# Allegro board INTERPHONE_AD_VER3-1-26_150206.brd
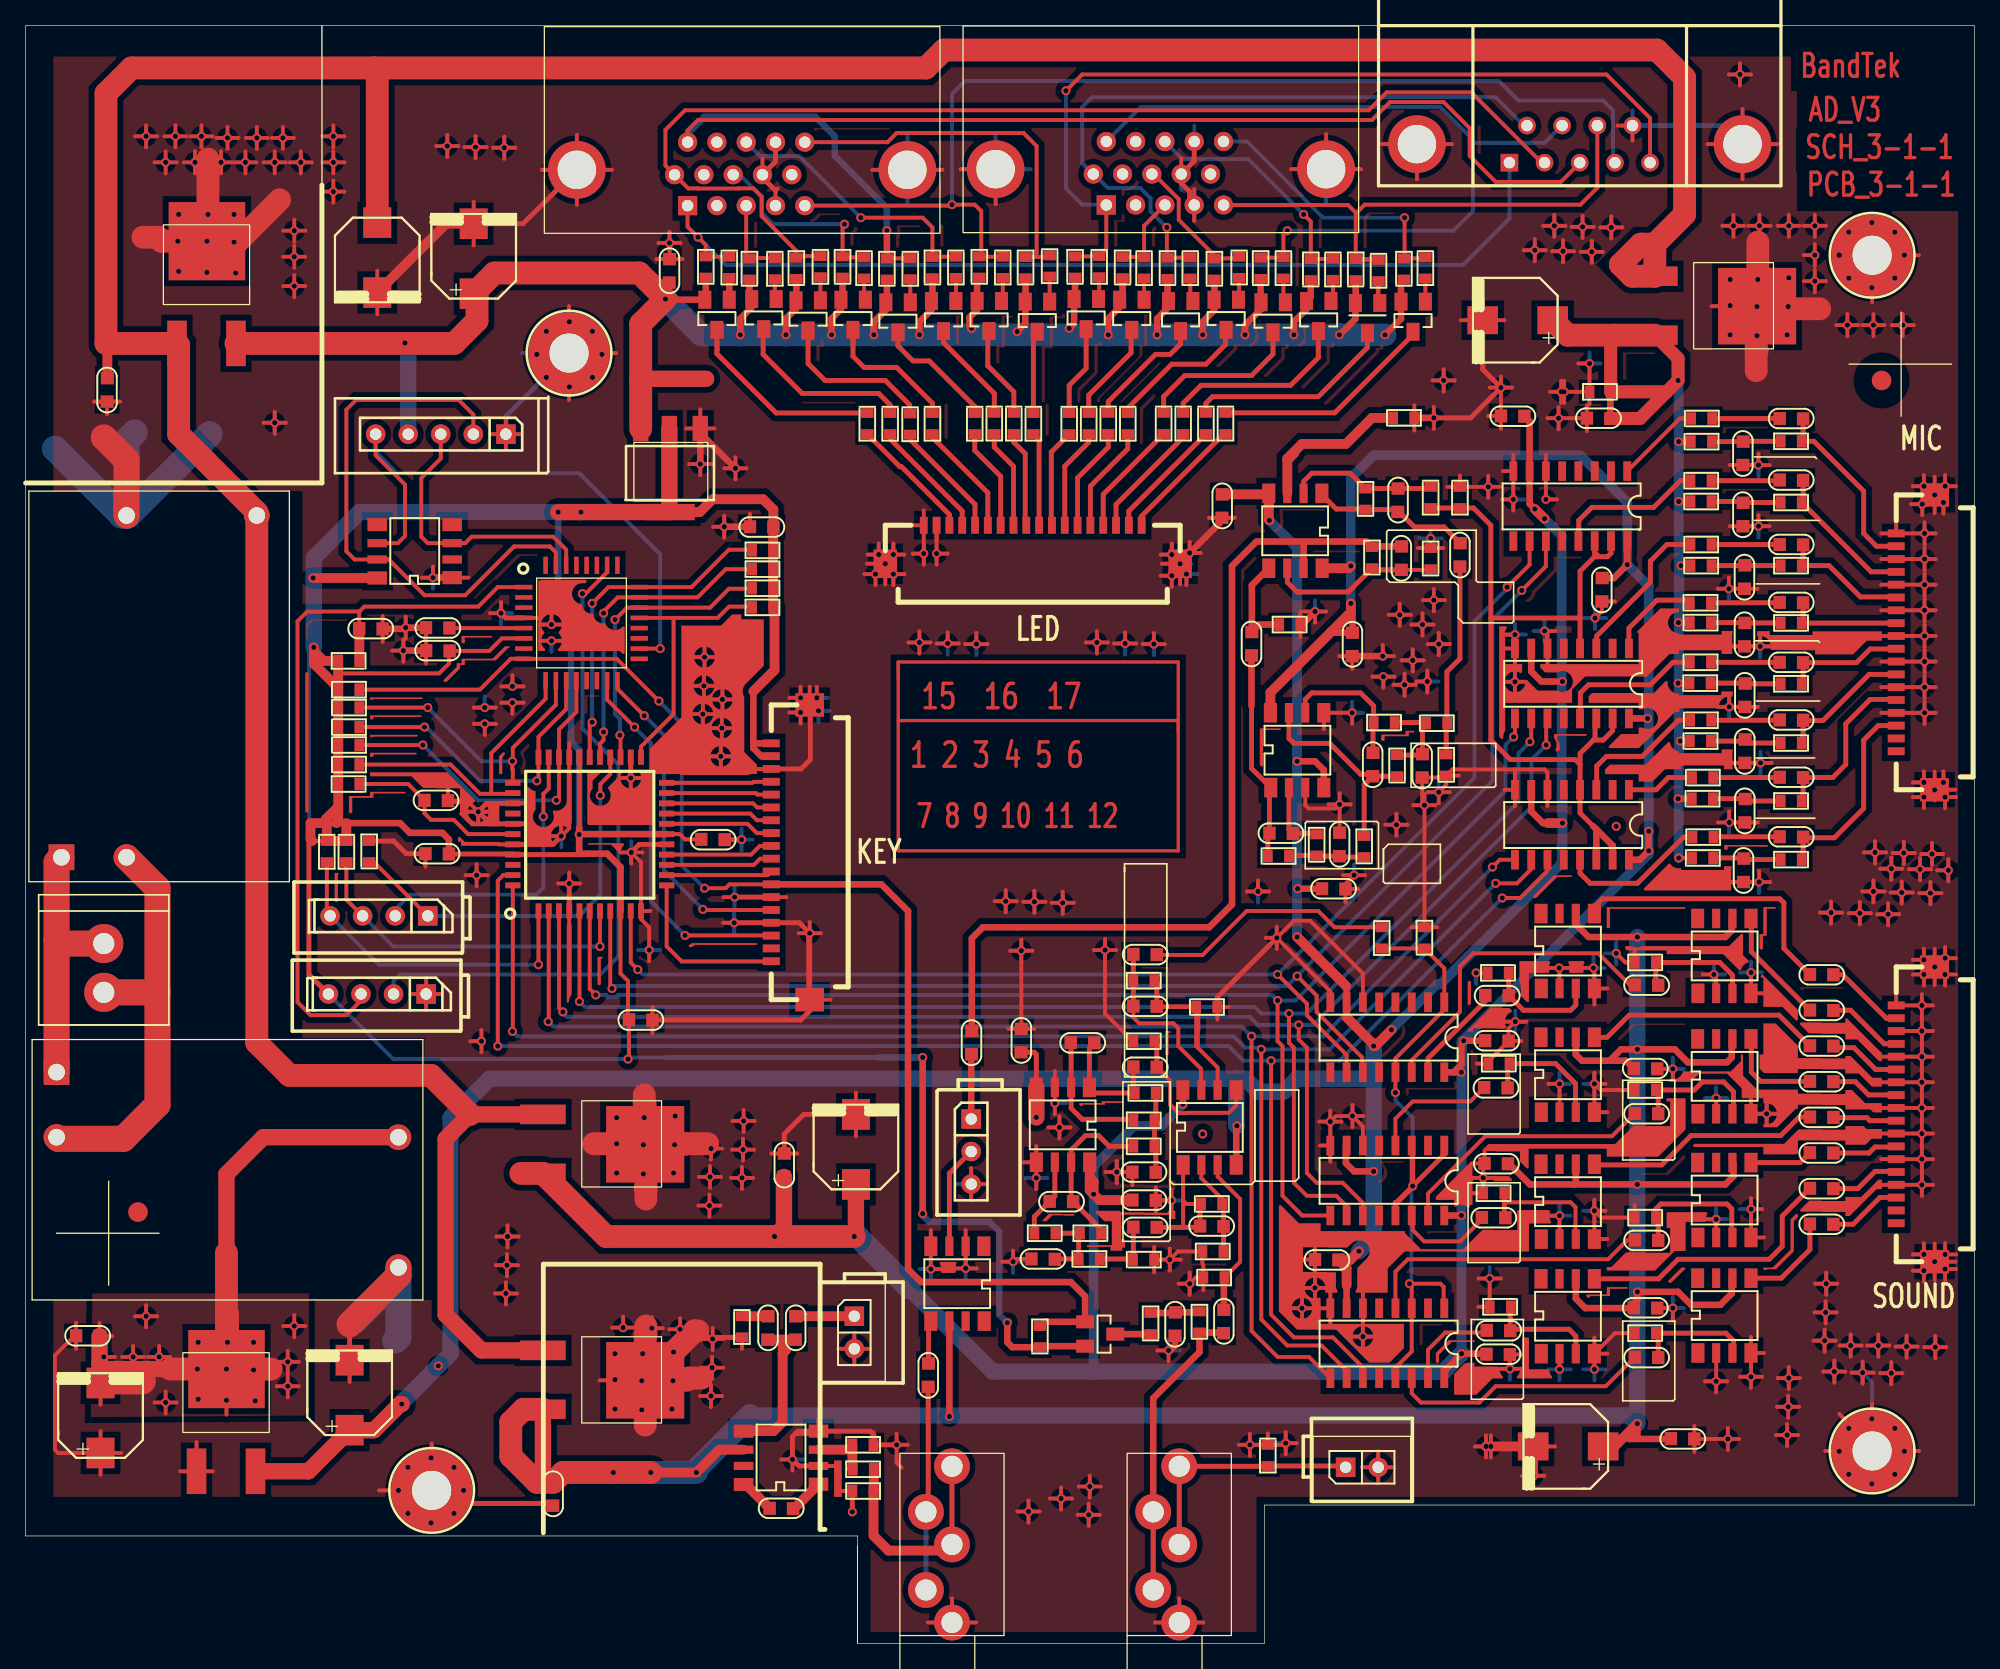
[diagram p0: board, top side]
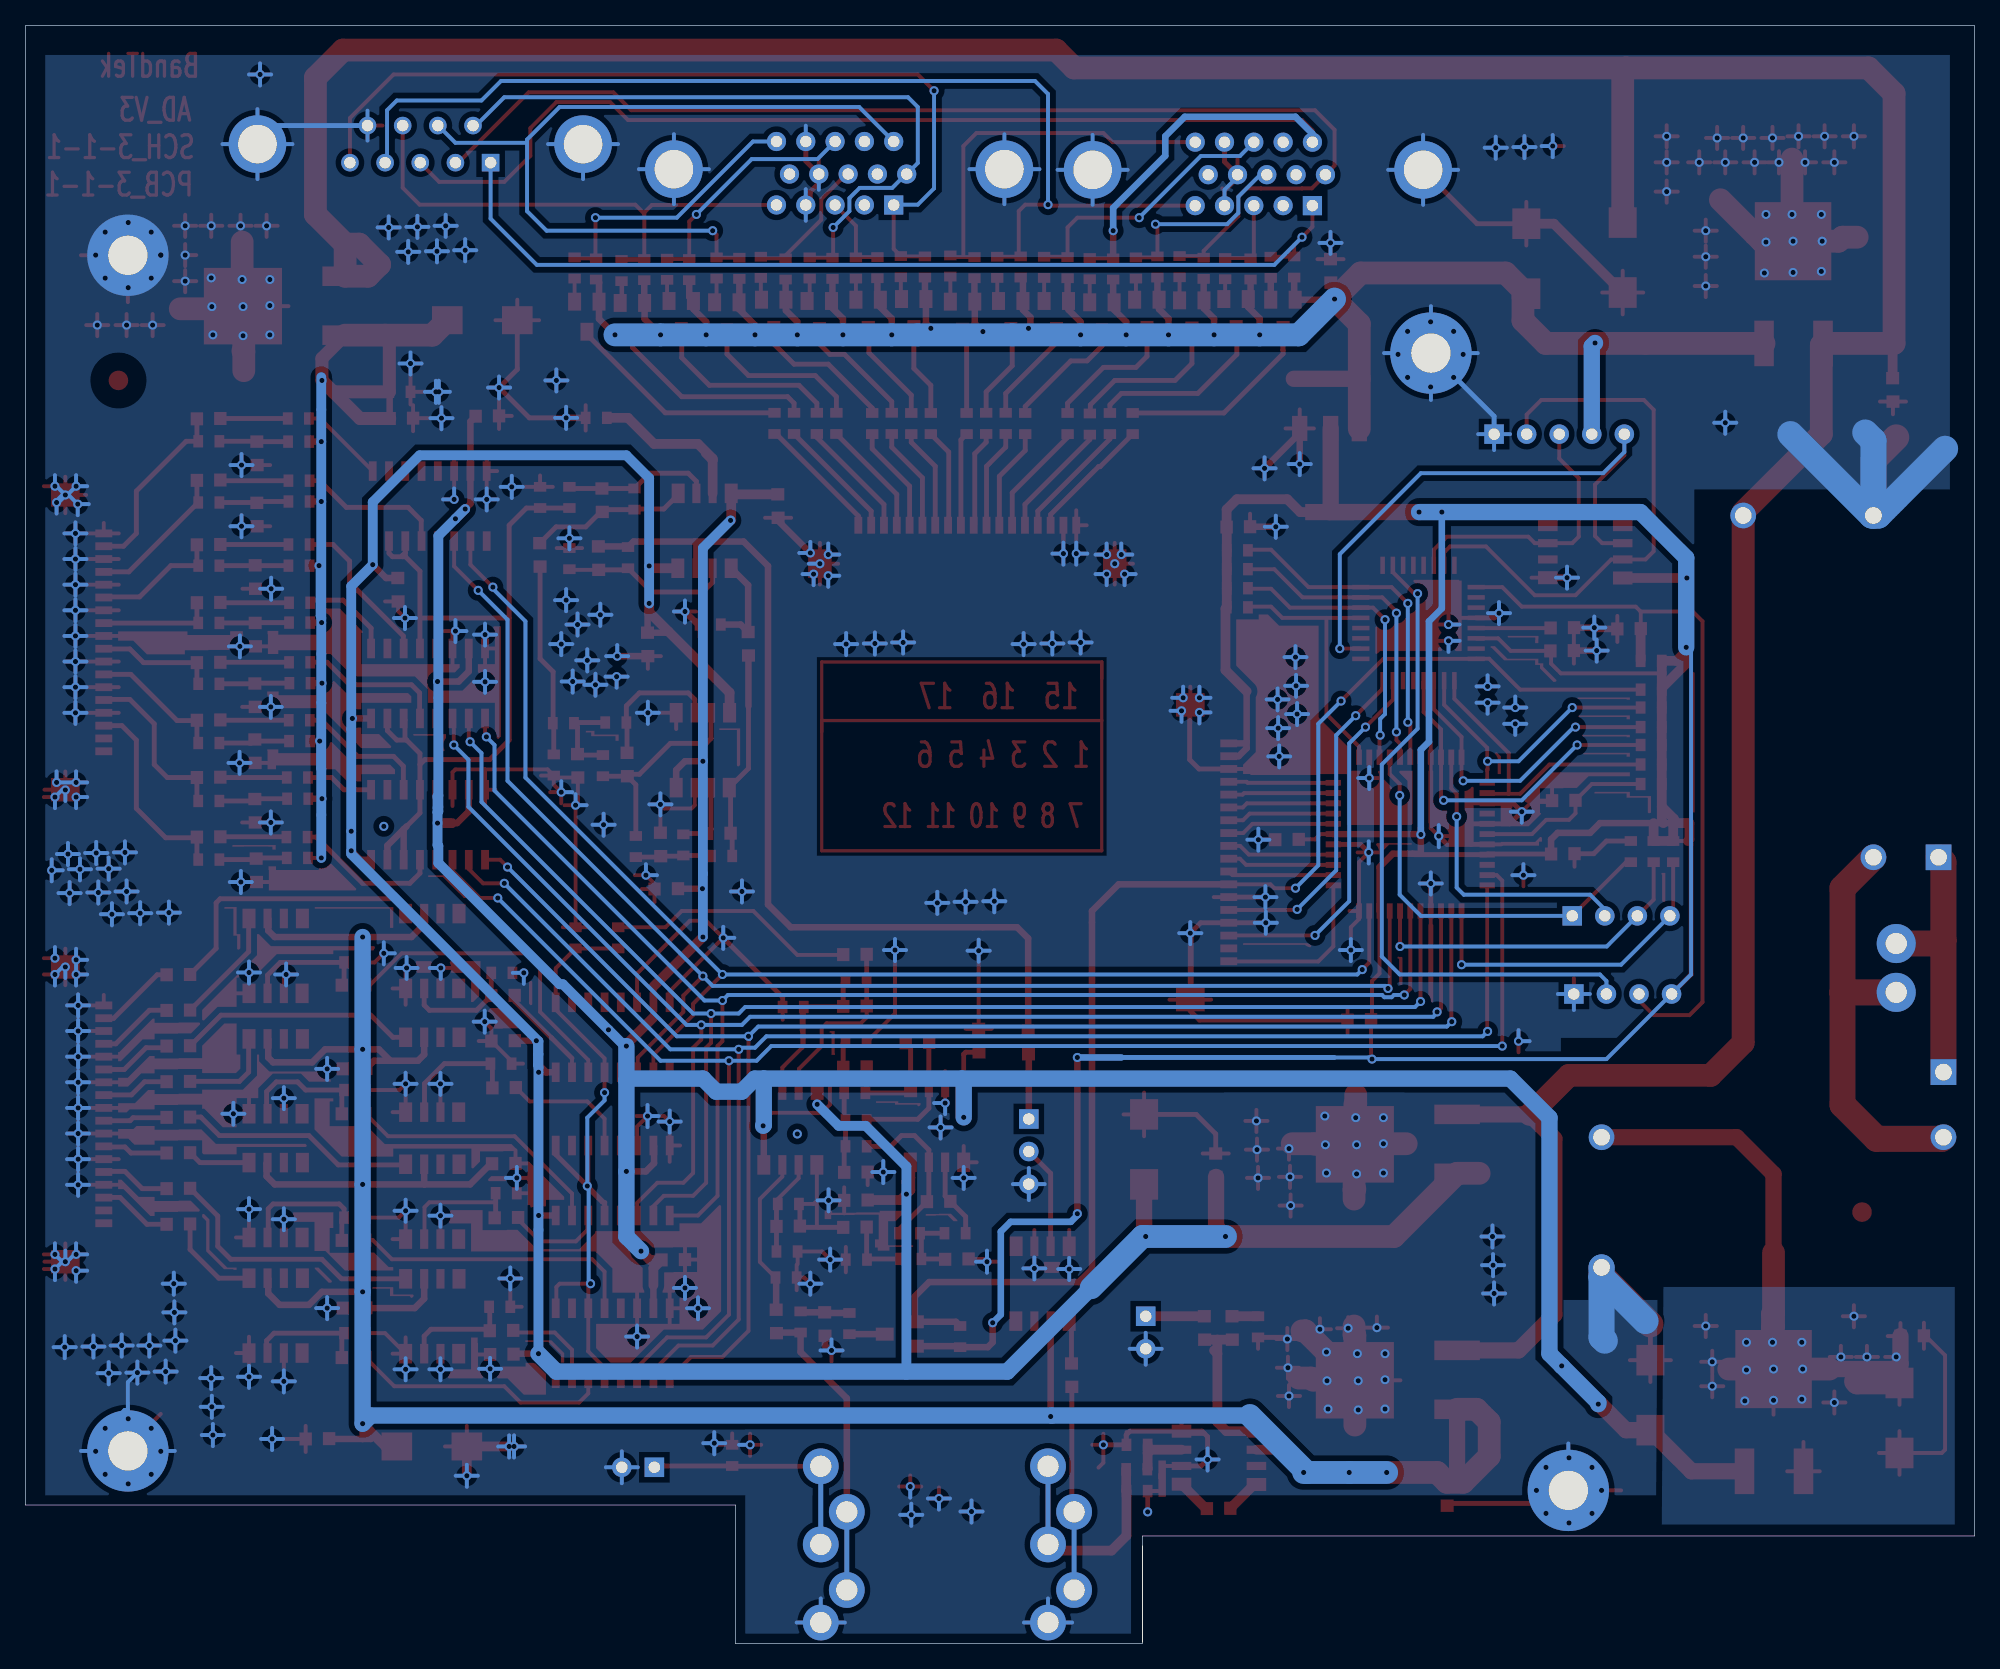
[diagram p1: board, bottom side, seen from below]

Outline 152.02 x 126.24 mm; copper layers: TOP, BOTTOM. Coordinates in mm from the lower left corner of the outline.
Outline path: 64.9,7.62 64.9,0.05 ; 0,126.24 152.02,126.24 152.02,10.79 96.65,10.79 96.65,0 64.9,0 64.9,8.38 0,8.38 0,126.24

## Design rules (mm)
nets with their own width: min track width 0.508; nets -12V

## Placement (name value [footprint] x y rotation side)
C6  100uf  [C0603]  140.13 52.17 0 top
C7  100uf  [C0603]  140.13 49.39 0 top
C8  100uf  [C0603]  140.13 46.61 0 top
C9  100uf  [C0603]  140.13 43.83 0 top
C10  100uf  [C0603]  140.13 41.05 0 top
C11  100uf  [C0603]  140.13 38.27 0 top
C12  100uf  [C0603]  140.13 35.48 0 top
C13  100uf  [C0603]  140.13 32.7 0 top
C19  0.1uF  [C0603]  32.08 61.62 180 top
C20  0.1uF  [C0603]  48.01 48.64 0 top
C21  0.1uF  [C0603]  32.13 77.47 180 top
C22  0.1uF  [C0603]  53.64 62.71 0 top
C68  100uf  [CAPAE660X570L]  27.43 110.36 270 top
C69  100uf  [CAPAE660X570L]  34.95 105.83 90 top
C70  0.1uF  [C0603]  50.23 107.12 90 top
C73  0.1uF  [C0603]  6.35 97.79 270 top
C75  0.1uF  [C0603]  122.96 82.19 270 top
C84  100uf  [CAPAE660X570L]  118.62 103.25 180 top
C86  0.1uF  [C0603]  122.68 95.61 180 top
C87  100p  [C0603]  107.06 89.23 90 top
C89  2.2nF  [C0603]  105.08 68.55 270 top
C90  0.1uF  [C0603]  116.03 95.76 0 top
C91  0.01uF  [C0603]  97.92 63.22 180 top
C95  0.1uF  [C0603]  111.89 84.91 270 top
C96  0.1uF  [C0603]  95.63 77.98 270 top
C97  10uF  [C0603]  73.79 46.86 270 top
C98  100uf  [C0603]  70.41 20.9 270 top
C101  0.01uF  [C0603]  108.94 68.45 270 top
C102  0.01uF  [C0603]  102.5 62.37 90 top
C103  0.1uF  [C0603]  103.5 77.98 90 top
C107  100pF  [C0603]  107.31 84.66 270 top
C110  0.1uF  [C0603]  114.74 37.43 0 top
C111  0.01uF  [C0603]  126.34 44.86 180 top
C115  0.1uF  [C0603]  137.72 72.06 180 top
C116  0.1uF  [C0603]  137.72 81.23 180 top
C117  0.1uF  [C0603]  137.72 90.78 180 top
C118  0.1uF  [C0603]  137.72 62.94 180 top
C119  10uF  [C0603]  134.11 69.6 270 top
C120  10uF  [C0603]  134.09 78.69 270 top
C121  10uF  [C0603]  133.96 88.06 270 top
C122  10uF  [C0603]  134.01 60.3 270 top
C123  0.1uF  [C0603]  137.72 67.59 180 top
C124  0.1uF  [C0603]  137.72 85.75 180 top
C125  0.1uF  [C0603]  137.72 76.56 180 top
C126  0.1uF  [C0603]  137.72 95.58 180 top
C127  10uF  [C0603]  134.11 64.95 270 top
C128  10uF  [C0603]  134.09 83.19 270 top
C129  10uF  [C0603]  134.11 73.96 270 top
C130  10uF  [C0603]  133.96 92.84 270 top
C131  100pF  [C0603]  92.51 32.56 180 top
C132  2.2nF  [C0603]  80.82 34.47 0 top
C134  0.1uF  [C0603]  93.34 88.77 90 top
C135  0.01uF  [C0603]  82.47 46.86 0 top
C136  0.1uF  [C0603]  114.85 22.57 180 top
C137  0.1uF  [C0603]  93.47 25.15 90 top
C138  0.1uF  [C0603]  87.35 32.46 0 top
C139  0.1uF  [C0603]  87.35 44.96 0 top
C140  1uF  [C0603]  87.35 53.75 0 top
C141  0.01uF  [C0603]  79.35 30 180 top
C142  0.01uF  [C0603]  87.22 36.78 180 top
C144  0.1uF  [C0603]  114.74 47.03 180 top
C145  0.1uF  [C0603]  101.52 29.92 0 top
C146  10uF  [C0603]  89.66 24.89 270 top
C148  100pF  [C0603]  87.35 49.71 0 top
C154  1uF  [C0603]  126.47 22.3 0 top
C155  1uF  [C0603]  114.92 24.4 0 top
C156  1uF  [C0603]  126.47 31.45 0 top
C157  1uF  [C0603]  114.54 33.21 0 top
C166  1uF  [C0603]  126.47 41.33 0 top
C167  1uF  [C0603]  114.72 43.35 0 top
C168  1uF  [C0603]  126.47 51.36 0 top
C169  1uF  [C0603]  114.81 50.55 0 top
C181  100uf  [CAPAE660X570L]  122.56 15.37 180 top
C182  100uf  [CAPAE660X570L]  5.84 15.37 90 top
C183  0.1uF  [C0603]  4.83 24 180 top
C185  0.1uF  [C0603]  77.67 47.07 90 top
C403  100uf  [CAPAE660X570L]  64.77 36.32 90 top
C405  0.1uF  [C0603]  59.18 37.34 90 top
C406  NC\10uF  [C0603]  60.07 24.64 90 top
C407  NC  [C0603]  57.91 24.64 90 top
C409  NC\10uF  [C0603]  58.93 10.54 180 top
C411  100uf  [CAPAE660X570L]  25.27 17.14 90 top
C412  0.1uF  [C0603]  129.29 15.95 0 top
C413  0.1uF  [C0603]  87.22 34.59 180 top
C414  0.1uF  [C0603]  102.02 58.89 180 top
C415  0.01uF  [C0603]  41.15 11.68 90 top
C416  0.1uF  [C0603]  126.34 26.19 180 top
C417  0.1uF  [C0603]  57.44 87.11 0 top
C418  1uF  [C0603]  32.17 79.24 0 top
C421  0.1uF  [C0603]  26.91 79.18 180 top
C422  0.1uF  [C0603]  32 65.79 180 top
DB1  DB9  [DB9-H]  121.23 128.78 180 top
DB15-1  DB15-1  [DB15-VGA]  40.46 110.03 0 top
DB15-2  DB15-2  [DB15-VGA]  73.13 110.08 0 top
H1  h1  [MH250C120D]  144.04 108.32 0 top
H2  h1  [MH250C120D]  144.04 15.02 0 top
H3  h1  [MH250C120D]  42.39 100.69 0 top
H4  h1  [MH250C120D]  31.67 11.94 0 top
H5  NC\HEADER2  [HEADER2]  64.64 25.53 270 top
H6  E_MIC  [HEADER2]  102.97 13.74 0 top
H7  HEADER2  [HEADER2-150MIL]  6.1 50.8 0 top
J2  CPLD  [HEADER4]  31.37 56.77 180 top
J19  MASTER_sound_out  [3M5-MUSIC-COLOR]  72.26 13.82 180 top
J20  MASTER_mic_in  [3M5-MUSIC-COLOR]  89.99 13.82 180 top
J21  HEADER  [HEADER5]  37.47 94.36 180 top
MIC_IN1  MIC_IN  [FH12-18-1SH]  145.92 86.61 270 top
NOREF  -  []  45.8 9.6 0 top
NOREF#2  -  [unnamed#2]  144.78 98.55 0 top
NOREF#3  -  [unnamed#2]  8.76 33.66 0 top
PORT2  PORT2  [FH12-18-1SH]  87.06 87.25 180 top
PORT4  PORT  [FH12-18-1SH]  58.17 70.23 270 top
POT1  10k/DIP  [HEADER3]  73.76 37.11 270 top
Q1  3906  [SOT23]  61.04 103.63 0 top
Q2  3906  [SOT23]  53.92 103.68 0 top
Q3  3906  [SOT23]  64.54 103.68 0 top
Q4  3906  [SOT23]  57.58 103.73 0 top
Q5  3906  [SOT23]  68.05 103.48 0 top
Q6  3906  [SOT23]  75.16 103.58 0 top
Q7  3906  [SOT23]  71.6 103.58 0 top
Q8  3906  [SOT23]  78.92 103.53 0 top
Q9  3906  [SOT23]  82.73 103.73 0 top
Q10  3906  [SOT23]  90.09 103.58 0 top
Q11  3906  [SOT23]  86.28 103.68 0 top
Q12  3906  [SOT23]  93.65 103.68 0 top
Q13  3906  [SOT23]  104.67 103.43 0 top
Q14  3906  [SOT23]  97.31 103.48 0 top
Q15  3906  [SOT23]  108.23 103.53 0 top
Q16  3906  [SOT23]  100.86 103.58 0 top
Q33  TCS1307  [SOT23]  83.82 24.13 90 top
R10  1K  [R0603]  69 95.21 270 top
R11  1K  [R0603]  65.66 95.25 270 top
R12  10K  [R0603]  60.12 107.24 90 top
R13  10K  [R0603]  53.06 107.34 90 top
R14  1K  [R0603]  62 107.49 270 top
R15  1K  [R0603]  54.89 107.44 270 top
R16  1K  [R0603]  70.74 95.25 270 top
R17  1K  [R0603]  67.44 95.25 270 top
R18  10K  [R0603]  63.73 107.34 90 top
R19  10K  [R0603]  56.46 107.19 90 top
R20  1K  [R0603]  65.41 107.39 270 top
R21  1K  [R0603]  58.45 107.34 270 top
R22  1K  [R0603]  74.04 95.25 270 top
R23  1K  [R0603]  77.09 95.26 270 top
R24  10K  [R0603]  67.18 107.19 90 top
R25  10K  [R0603]  74.4 107.34 90 top
R26  1K  [R0603]  69.01 107.34 270 top
R27  1K  [R0603]  76.23 107.44 270 top
R28  1K  [R0603]  75.56 95.26 270 top
R29  1K  [R0603]  78.61 95.25 270 top
R30  10K  [R0603]  70.74 107.29 90 top
R31  10K  [R0603]  78 107.29 90 top
R32  1K  [R0603]  72.57 107.44 270 top
R33  1K  [R0603]  79.88 107.54 270 top
R34  1K  [R0603]  81.41 95.25 270 top
R35  1K  [R0603]  84.45 95.26 270 top
R36  10K  [R0603]  81.86 107.34 90 top
R37  10K  [R0603]  89.08 107.24 90 top
R38  1K  [R0603]  83.74 107.49 270 top
R39  1K  [R0603]  90.86 107.39 270 top
R40  1K  [R0603]  82.93 95.25 270 top
R41  1K  [R0603]  85.98 95.25 270 top
R42  10K  [R0603]  85.57 107.29 90 top
R43  10K  [R0603]  92.74 107.19 90 top
R44  1K  [R0603]  87.25 107.39 270 top
R45  1K  [R0603]  94.67 107.44 270 top
R46  1K  [R0603]  92.08 95.26 270 top
R47  1K  [R0603]  88.77 95.26 270 top
R48  10K  [R0603]  103.76 107.14 90 top
R49  10K  [R0603]  96.34 107.24 90 top
R50  1K  [R0603]  105.54 107.19 270 top
R51  1K  [R0603]  98.12 107.39 270 top
R52  1K  [R0603]  93.6 95.26 270 top
R53  1K  [R0603]  90.3 95.26 270 top
R54  10K  [R0603]  107.52 107.19 90 top
R55  10K  [R0603]  100.25 107.14 90 top
R56  1K  [R0603]  109.19 107.39 270 top
R57  1K  [R0603]  101.98 107.29 270 top
R80  5.1k  [R0603]  104.52 89.23 90 top
R81  6.8k  [R0603]  106.98 68.43 90 top
R82  3.3k  [R0603]  97.66 61.44 0 top
R83  100  [R0603]  109.6 89.48 270 top
R84  6.8k  [R0603]  110.01 71.81 0 top
R85  5.1k  [R0603]  106.05 71.86 180 top
R86  3.3k  [R0603]  104.42 62.12 90 top
R87  3.3k  [R0603]  100.71 62.24 90 top
R88  3.3k  [R0603]  111.89 89.48 270 top
R89  5.1k  [R0603]  110.82 68.48 90 top
R91  5.1k  [R0603]  98.68 79.5 180 top
R92  10k  [R0603]  107.44 95.63 0 top
R93  10k  [R0603]  105.03 84.66 90 top
R94  3.3k  [R0603]  109.6 84.58 90 top
R95  12k  [R0603]  130.61 72.03 0 top
R96  12k  [R0603]  130.58 81.2 0 top
R97  12k  [R0603]  130.63 90.73 0 top
R98  12k  [R0603]  130.78 62.92 0 top
R99  100  [R0603]  137.79 70.26 180 top
R100  100  [R0603]  137.79 79.63 180 top
R101  100  [R0603]  137.79 89.03 180 top
R102  100  [R0603]  137.79 61.16 180 top
R103  100  [R0603]  130.58 70.41 0 top
R104  100  [R0603]  130.58 79.65 0 top
R105  100  [R0603]  130.63 89.1 0 top
R106  100  [R0603]  130.76 61.29 0 top
R107  12k  [R0603]  130.76 67.56 0 top
R108  12k  [R0603]  130.63 85.75 0 top
R109  12k  [R0603]  130.58 76.56 0 top
R110  12k  [R0603]  130.68 95.58 0 top
R111  100  [R0603]  137.79 74.88 180 top
R112  100  [R0603]  137.79 65.74 180 top
R113  100  [R0603]  137.79 84.1 180 top
R114  100  [R0603]  130.73 65.91 0 top
R115  100  [R0603]  130.63 84.1 0 top
R116  100  [R0603]  137.79 93.8 180 top
R117  100  [R0603]  130.56 74.93 0 top
R118  100  [R0603]  130.66 93.78 0 top
R119  10k  [R0603]  92.46 34.29 0 top
R120  6.8k  [R0603]  83.13 32 180 top
R121  3.3k  [R0603]  87.27 42.95 0 top
R122  6.8k  [R0603]  82.91 30 0 top
R123  5.1k  [R0603]  79.58 32 180 top
R124  100k  [R0603]  96.9 14.73 270 top
R125  5.1k  [R0603]  92.63 28.55 0 top
R126  3.3k  [R0603]  87.3 38.79 180 top
R127  3.3k  [R0603]  87.3 40.82 180 top
R128  5.1k  [R0603]  87.15 29.95 0 top
R129  5.1k  [R0603]  87.3 46.99 180 top
R130  5.1k  [R0603]  109.12 54.99 90 top
R131  3.3k  [R0603]  91.57 25.02 90 top
R132  3.3k  [R0603]  92.68 30.58 180 top
R133  20k  [R0603]  87.76 24.89 90 top
R134  1K  [R0603]  79.12 23.88 90 top
R135  10k  [R0603]  87.3 51.71 180 top
R136  3.3k  [R0603]  92.08 49.66 0 top
R137  100k  [R0603]  126.42 24.21 180 top
R138  100k  [R0603]  115.1 26.26 180 top
R139  100k  [R0603]  126.42 33.22 180 top
R140  100k  [R0603]  114.59 35.13 180 top
R141  100k  [R0603]  126.42 43.18 180 top
R142  100k  [R0603]  115 45.24 180 top
R143  100k  [R0603]  126.42 53.14 180 top
R144  100k  [R0603]  114.94 52.32 180 top
R145  0R  [R0603]  105.79 55.12 270 top
R164  NC  [R0603]  55.88 24.77 270 top
R165  100k  [R0603]  65.25 11.89 0 top
R166  NC\10k  [R0603]  65.41 13.59 180 top
R167  NC\3.3k  [R0603]  65.25 15.49 0 top
R168  5.1k  [R0603]  122.89 97.66 180 top
R187  10K  [R0603]  25.15 68.58 0 top
R188  10K  [R0603]  25.15 73.03 0 top
R189  10K  [R0603]  25.15 71.5 0 top
R190  10K  [R0603]  25.15 70.1 0 top
R191  10K  [R0603]  57.56 85.29 180 top
R192  10K  [R0603]  57.56 82.34 180 top
R193  10K  [R0603]  57.56 83.83 180 top
R194  10K  [R0603]  57.56 80.84 180 top
R195  10k  [R0603]  25.27 76.67 180 top
R196  10K  [R0603]  25.15 74.42 0 top
R208  10k  [R0603]  25.02 61.85 270 top
R209  10k  [R0603]  23.5 61.85 270 top
R210  10k  [R0603]  26.8 61.72 90 top
R213  10k  [R0603]  25.27 67.06 180 top
SOUND_OUT1  SOUND_OUT  [FH12-18-1SH]  145.92 49.78 270 top
U7  EPM7032  [TQFP44]  44.09 63.15 90 top
U15  79M05  [TO252AA]  13.34 14.73 0 top
U18  78M05  [TO252AA]  11.81 102.74 0 top
U21  5532  [SOP8]  100.97 89.48 180 top
U22  5532  [SOP8]  97.28 67.03 0 top
U24  386  [SOP8]  74.6 30.73 180 top
U25  5532  [SOP8]  82.83 43.13 180 top
U26  5532  [SOP8]  90.45 37.59 0 top
U27  386  [SOP8]  130.61 22.91 0 top
U28  386  [SOP8]  118.39 22.86 0 top
U29  386  [SOP8]  130.61 31.93 0 top
U30  386  [SOP8]  118.39 31.8 0 top
U31  386  [SOP8]  130.61 41.58 0 top
U32  386  [SOP8]  118.39 41.71 0 top
U33  386  [SOP8]  130.61 50.98 0 top
U34  386  [SOP8]  118.39 51.36 0 top
U35  4053  [SOIC16]  106.22 23.67 270 top
U36  4053  [SOIC16]  120.62 64.14 270 top
U37  4053  [SOIC16]  106.22 36.37 270 top
U38  4053  [SOIC16]  120.62 75.16 270 top
U41  4053  [SOIC16]  106.22 47.55 270 top
U42  4053  [SOIC16]  120.5 89 270 top
U45  78M05  [TO252AA]  128.4 106.68 270 top
U47  NC\386  [SOP8]  61.59 12.57 90 top
U48  78M05  [TO252AA]  41.66 41.27 270 top
U51  78M05  [TO252AA]  41.66 22.86 270 top
U52  STM8S103K3T6C  [LQFP32]  43.36 79.62 0 top
U400  TPM  [SOP8]  33.02 83.31 90 top
U401  1117  [SOT-223]  50.29 94.75 180 top
U402  POWER_AC_TO_DC1  [ACDC_MODEL1]  15.75 36.96 0 top
U403  POWER_AC_TO_DC1  [ACDC_MODEL1]  10.41 74.68 90 top
UART_2  UART_51  [HEADER4]  31.24 50.67 180 top

## Library data of the parts
C6-C13 C68 C69 C84 C97 C98 C119-C122 C127-C130 C146 C181 C182 C403 C409 C411 = CAPACITOR POL_0
C19-C22 = CAPACITOR NON-POL
C70 C73 C75 C86 C87 C89-C91 C95 C96 C101-C103 C107 C110 C111 C115-C118 C123-C126 C131 C132 C134-C142 C144 C145 C148 C154-C157 C166-C169 C183 C185 C405-C407 C412-C418 C421 C422 = CAP_0
DB1 = CON2_13
DB15-1 DB15-2 = CON2_8: User Part Number: ***
H1-H4 = HEADER 5_0
H5 H6 = CY7C68013A-100_0
H7 = HEADER2
J2 UART_2 = HEADER 5_6
J19 J20 = CON2_12
J21 = HEADER5
MIC_IN1 = CON2_2
PORT2 = CON2_0
PORT4 = CON2_7
POT1 = RESISTOR VAR_0
Q1-Q16 = NPN_3
Q33 = FDC634P_4
R10-R57 = R_1
R80-R89 R91-R145 R164-R167 = RESISTOR_2
R168 R187-R194 R196 = RES
R195 R208-R210 R213 = R
SOUND_OUT1 = CON2_1
U7 = EPM7032_1
U15 = CY7C68013A-100_4
U18 U45 U48 U51 = CY7C68013A-100_3
U21 U22 U25 U26 = 1211_23
U24 U27-U34 U47 = 1211_14
U35-U38 U41 U42 = 4051_6
U52 = STM8
U400 = TPM
U401 = 1117
U402 U403 = POWER_AC_TO_DC1

## Footprints (pads in the part's own frame, mm; a bottom-side part is the same pattern mirrored in y, then rotated)
3M5-MUSIC-COLOR
  round 2.794 hole 1.651: 1(0,12.192) 2(2.032,9.652) 3(0,6.096) 4(2.032,3.556) 5(0,0)
ACDC_MODEL1
  rect 2.007x2.007 hole 1.295: 1(-13.335,7.62)
  round 2.007 hole 1.295: 2(-13.335,2.54) 3(13.335,-7.62) 5(13.335,2.54)
C0603
  rect 0.965x1.016 smd: 1(-0.94,0.025) 2(0.889,0)
CAPAE660X570L
  rect 2.388x2.184 smd: 1(-0.508,0) 2(4.953,0)
DB9-H
  rect 1.372x1.372 hole 0.889: 1(5.486,13.233)
  round 1.372 hole 0.889: 2(2.743,13.233) 3(0,13.233) 4(-2.743,13.233) 5(-5.486,13.233) 6(4.115,10.338) 7(1.372,10.338) 8(-1.372,10.338) 9(-4.115,10.338)
  round 4.496 hole 2.997: 10(-12.7,11.786) 11(12.7,11.786)
DB15-VGA
  rect 1.499x1.499 hole 0.889: 1(11.176,2.159)
  round 1.499 hole 0.889: 2(13.462,2.159) 3(15.748,2.159) 4(18.034,2.159) 5(20.32,2.159) 6(10.16,4.572) 7(12.446,4.572) 8(14.732,4.572) 9(17.018,4.572) 10(19.304,4.572) 11(11.176,7.112) 12(13.462,7.112) 13(15.748,7.112) 14(18.034,7.112) 15(20.32,7.112)
  round 4.496 hole 2.997: 16(2.54,4.953) 17(28.321,4.953)
FH12-18-1SH
  rect 0.61x1.321 smd: 1(0,0) 2(1.001,0) 3(1.999,0) 4(3,0) 5(4,0) 6(5.001,0) 7(6,0) 8(7,0) 9(8.001,0) 10(8.999,0) 11(10,0) 12(11.001,0) 13(11.999,0) 14(13,0) 15(14.001,0) 16(15.001,0) 17(16,0) 18(17,0)
  rect 1.829x2.235 smd: 19(20,3) 20(-3,3)
HEADER2
  rect 1.524x1.524 hole 0.889: 1(0,0)
  round 1.524 hole 0.889: 2(2.54,0)
HEADER2-150MIL
  round 3.048 hole 1.651: 1(0,3.81) 2(0,0)
HEADER3
  rect 1.524x1.524 hole 0.889: 1(-3.81,0)
  round 1.524 hole 0.889: 2(-1.27,0) 3(1.27,0)
HEADER4
  rect 1.524x1.524 hole 0.889: 1(0,0)
  round 1.524 hole 0.889: 2(2.54,0) 3(5.08,0) 4(7.62,0)
HEADER5
  rect 1.524x1.524 hole 0.889: 1(0,0)
  round 1.524 hole 0.889: 2(2.54,0) 3(5.08,0) 4(7.62,0) 5(10.16,0)
LQFP32
  rect 1.346x0.356 smd: 1(-4.501,2.799) 2(-4.501,1.999) 3(-4.501,1.199) 4(-4.501,0.399) 5(-4.501,-0.399) 6(-4.501,-1.199) 7(-4.501,-1.999) 8(-4.501,-2.799) 17(4.501,-2.799) 18(4.501,-1.999) 19(4.501,-1.199) 20(4.501,-0.399) 21(4.501,0.399) 22(4.501,1.199) 23(4.501,1.999) 24(4.501,2.799)
  rect 0.356x1.346 smd: 9(-2.799,-4.501) 10(-1.999,-4.501) 11(-1.199,-4.501) 12(-0.399,-4.501) 13(0.399,-4.501) 14(1.199,-4.501) 15(1.999,-4.501) 16(2.799,-4.501) 25(2.799,4.501) 26(1.999,4.501) 27(1.199,4.501) 28(0.399,4.501) 29(-0.399,4.501) 30(-1.199,4.501) 31(-1.999,4.501) 32(-2.799,4.501)
MH250C120D
  round 6.35 hole 3.048: 1(0,0)
R0603
  rect 0.762x0.965 smd: 1(-0.762,0) 2(0.889,0)
SOIC16
  rect 1.524x0.61 smd: 1(-2.477,4.445) 2(-2.477,3.175) 3(-2.477,1.905) 4(-2.477,0.635) 5(-2.477,-0.635) 6(-2.477,-1.905) 7(-2.477,-3.175) 8(-2.477,-4.445) 9(2.985,-4.445) 10(2.985,-3.175) 11(2.985,-1.905) 12(2.985,-0.635) 13(2.985,0.635) 14(2.985,1.905) 15(2.985,3.175) 16(2.985,4.445)
SOP8
  rect 1.016x1.524 smd: 1(-0.152,-0.254) 4(3.988,-0.254) 5(3.988,5.588) 8(-0.178,5.588)
  rect 0.635x1.524 smd: 2(1.27,-0.254) 3(2.54,-0.254) 6(2.54,5.588) 7(1.27,5.588)
SOT23
  rect 1.016x1.397 smd: 1(0.965,1.168) 2(-0.94,1.168) 3(0,-1.181)
SOT-223
  rect 1.194x1.956 smd: 1(-2.337,-0.051) 2(0.076,-0.051) 3(2.311,-0.025)
  rect 3.81x1.27 smd: 4(0,6.477)
TO252AA
  rect 1.524x3.556 smd: 1(-0.004,-1.304) 3(4.596,-1.304)
  rect 5.969x6.096 smd: 2(2.332,6.673)
TQFP44
  rect 1.194x0.457 smd: 1(-6,4.08) 2(-6,3.28) 3(-6,2.48) 4(-6,1.68) 5(-6,0.88) 6(-6,0.08) 7(-6,-0.72) 8(-6,-1.52) 9(-6,-2.32) 10(-6,-3.12) 11(-6,-3.92) 23(6,-3.92) 24(6,-3.12) 25(6,-2.32) 26(6,-1.52) 27(6,-0.72) 28(6,0.08) 29(6,0.88) 30(6,1.68) 31(6,2.48) 32(6,3.28) 33(6,4.08)
  rect 0.457x1.194 smd: 12(-4,-5.92) 13(-3.2,-5.92) 14(-2.4,-5.92) 15(-1.6,-5.92) 16(-0.8,-5.92) 17(0,-5.92) 18(0.8,-5.92) 19(1.6,-5.92) 20(2.4,-5.92) 21(3.2,-5.92) 22(4,-5.92) 34(4,6.08) 35(3.2,6.08) 36(2.4,6.08) 37(1.6,6.08) 38(0.8,6.08) 39(0,6.08) 40(-0.8,6.08) 41(-1.6,6.08) 42(-2.4,6.08) 43(-3.2,6.08) 44(-4,6.08)
unnamed#2
  round 1.524 smd: 1(0,0)

## Nets
5V-1: C75.1 C103.2 C136.2 C144.2 C403.1 C405.1 C413.2 U21.8(+VCC) U22.8(+VCC) U25.8(+VCC) U26.8(+VCC) U35.16(VDD) U36.16(VDD) U37.16(VDD) U38.16(VDD) U41.16(VDD) U42.16(VDD) U48.3(OUT)
5V-2: C69.1 C70.1 J21.4 Q1.2 Q2.2 Q3.2 Q4.2 Q5.2 Q6.2 Q7.2 Q8.2 Q9.2 Q10.2 Q11.2 Q12.2 Q13.2 Q14.2 Q15.2 Q16.2 R12.1 R13.1 R18.1 R19.1 R24.1 R25.1 R30.1 R31.1 R36.1 R37.1 R42.1 R43.1 R48.1 R49.1 R54.1 R55.1 U18.3(OUT) U401.3(IN)
5V-3: C84.1 C86.1 R103.1 R104.1 R105.1 R106.1 R114.1 R115.1 R117.1 R118.1 R168.1 U45.3(OUT)
5V-4: C110.2 C111.2 C181.1 C412.1 C415.2 C416.2 U24.6(VCC) U27.6(VCC) U28.6(VCC) U29.6(VCC) U30.6(VCC) U31.6(VCC) U32.6(VCC) U33.6(VCC) U34.6(VCC) U47.6(VCC) U51.3(OUT)
+12V: C68.1 C73.1 U18.1(IN) U45.1(IN) U48.1(IN) U51.1(IN) U403.3(DC_OUT)
-5V: C90.2 C134.2 C145.2 C185.1 C411.1 C414.2 U15.3(OUT) U21.4(-VDD) U22.4(-VDD) U25.4(-VDD) U26.4(-VDD) U35.7(VEE) U36.7(VEE) U37.7(VEE) U38.7(VEE) U41.7(VEE) U42.7(VEE)
-12V: C182.2 C183.1 U15.2(IN) U402.5(GND)
GND: C19.2 C20.2 C21.2 C22.2 C68.2 C69.2 C70.2 C73.2 C75.2 C84.2 C86.2 C90.1 C101.2 C102.2 C103.1 C110.1 C111.1 C119.2 C120.2 C121.2 C122.2 C127.2 C128.2 C129.2 C130.2 C134.1 C136.1 C141.2 C142.2 C144.1 C145.1 C146.2 C181.2 C182.1 C183.2 C185.2 C403.2 C405.2 C411.2 C412.2 C413.1 C414.1 C415.1 C416.1 C417.1 C418.1 C421.1 C422.1 DB1.9 DB1.10 DB1.11 DB15-1.4 DB15-1.9 DB15-1.14 DB15-1.16 DB15-1.17 DB15-2.4 DB15-2.9 DB15-2.14 DB15-2.16 DB15-2.17 H1.1 H2.1 H3.1 H4.1 H5.2 H6.2 J19.1 J20.1 J21.1 MIC_IN1.1 MIC_IN1.3 MIC_IN1.5 MIC_IN1.7 MIC_IN1.9 MIC_IN1.11 MIC_IN1.13 MIC_IN1.15 MIC_IN1.19 MIC_IN1.20 PORT2.17 PORT2.18 PORT2.19 PORT2.20 PORT4.3 PORT4.13 PORT4.15 PORT4.19 PORT4.20 POT1.3(B) R88.1 R89.1 R91.1 R92.2 R94.2 R124.1 R125.1 R128.2 R129.2 R130.2 R132.2 R136.2 R137.2 R138.2 R139.2 R140.2 R141.2 R142.2 R143.2 R144.2 R164.2 R165.1 R167.2 R168.2 R210.2 SOUND_OUT1.1 SOUND_OUT1.3 SOUND_OUT1.5 SOUND_OUT1.7 SOUND_OUT1.9 SOUND_OUT1.11 SOUND_OUT1.13 SOUND_OUT1.15 SOUND_OUT1.19 SOUND_OUT1.20 U7.4(GND1) U7.11(IO6) U7.16(GND2) U7.24(GND3) U7.30(IO15) U7.36(GND4) U7.38(OE1) U7.40(OE2) U15.1(GND) U18.2(GND) U22.3(+IN) U22.5(+IN) U24.2(-IN) U24.4(GND) U25.3(+IN) U25.5(+IN) U27.2(-IN) U27.4(GND) U28.2(-IN) U28.4(GND) U29.2(-IN) U29.4(GND) U30.2(-IN) U30.4(GND) U31.2(-IN) U31.4(GND) U32.2(-IN) U32.4(GND) U33.2(-IN) U33.4(GND) U34.2(-IN) U34.4(GND) U35.6(E\N\) U35.8(GND) U36.6(E\N\) U36.8(GND) U37.6(E\N\) U37.8(GND) U38.6(E\N\) U38.8(GND) U41.6(E\N\) U41.8(GND) U42.6(E\N\) U42.8(GND) U45.2(GND) U47.2(-IN) U47.4(GND) U48.2(GND) U51.2(GND) U52.4(VSS) U400.1(GND) U401.1 U402.3(DC_OUT) U403.5(GND) UART_2.1
VDD33: C19.1 C20.1 C21.1 C22.1 C417.2 PORT4.1 PORT4.2 Q33.2(S) R134.1 R187.1 R188.1 R189.1 R190.1 R191.1 R192.1 R193.1 R194.1 R195.2 R196.1 R208.1 R209.1 R213.2 U7.9(VCC1) U7.17(VCC2) U7.29(VCC3) U7.41(VCC4) U52.6(VDD) U400.8(VCC) U401.2(OUT) U401.4(OUT1) UART_2.4
1-1: C118.1 MIC_IN1.16 R102.1
1-3: C13.1 U27.5(OUT)
1-4: PORT2.16 R11.2
1-5: PORT2.15 R17.2
2-1: C123.1 MIC_IN1.14 R112.1
2-3: C12.1 U28.5(OUT)
2-4: PORT2.14 R10.2
2-5: PORT2.13 R16.2
3-1: C115.1 MIC_IN1.12 R99.1
3-3: C11.1 U29.5(OUT)
3-4: PORT2.12 R22.2
3-5: PORT2.11 R28.2
4-1: C125.1 MIC_IN1.10 R111.1
4-3: C10.1 U30.5(OUT)
4-4: PORT2.10 R23.2
4-5: PORT2.9 R29.2
5-1: C116.1 MIC_IN1.8 R100.1
5-3: C9.1 U31.5(OUT)
5-4: PORT2.8 R34.2
5-5: PORT2.7 R40.2
6-1: C124.1 MIC_IN1.6 R113.1
6-3: C8.1 U32.5(OUT)
6-4: PORT2.6 R35.2
6-5: PORT2.5 R41.2
7-1: C117.1 MIC_IN1.4 R101.1
7-3: C7.1 U33.5(OUT)
7-4: PORT2.4 R47.2
7-5: PORT2.3 R53.2
8-1: C126.1 MIC_IN1.2 R116.1
8-3: C6.1 U34.5(OUT)
8-4: PORT2.2 R46.2
8-5: PORT2.1 R52.2
CH1_OUT1: R98.1 U36.13(AY)
CH1_PA: C154.1 U35.14(AX OR AY)
CH2_OUT2: R107.1 U36.1(BY)
CH2_PA: C155.1 U35.15(BX OR BY)
CH3_OUT3: R95.1 U36.3(CY)
CH3_PA: C156.1 U35.4(CX OR CY)
CH4_OUT4: R109.1 U38.13(AY)
CH4_PA: C157.1 U37.14(AX OR AY)
CH5_OUT5: R96.1 U38.1(BY)
CH5_PA: C166.1 U37.15(BX OR BY)
CH6_OUT6: R108.1 U38.3(CY)
CH6_PA: C167.1 U37.4(CX OR CY)
CH7_OUT7: R97.1 U42.13(AY)
CH7_PA: C168.1 U41.14(AX OR AY)
CH8_OUT8: R110.1 U42.1(BY)
CH8_PA: C169.1 U41.15(BX OR BY)
CH_SW_1: U7.43(IO9) U35.11(A) U36.11(A)
CH_SW_2: U7.44(IO8) U35.10(B) U36.10(B)
CH_SW_3: U7.2(IO2) U35.9(C) U36.9(C)
CH_SW_4: U7.3(IO1) U37.11(A) U38.11(A)
CH_SW_5: U7.5(IO3) U37.10(B) U38.10(B)
CH_SW_6: U7.6(IO4) U37.9(C) U38.9(C)
CH_SW_7: U7.8(IO5) U41.11(A) U42.11(A)
CH_SW_8: U7.10(IO7) U41.10(B) U42.10(B)
CLIENT_NOISE_IN: C139.2 R129.1 U26.5(+IN)
CPLD_TCK: J2.1 R210.1 U7.26(TCK)
CPLD_TDI: J2.4 R209.2 U7.1(TDI)
CPLD_TDO: J2.2 U7.32(TDO)
CPLD_TMS: J2.3 R208.2 U7.7(TMS)
DB15-1-1: DB1.1 DB15-1.1 R13.2 R15.1
DB15-1-2: DB15-1.2
DB15-1-3: DB15-1.3 R19.2 R21.1
DB15-1-5: DB1.4 DB15-1.5 R25.2 R27.1
DB15-1-6: DB1.2 DB15-1.6 R12.2 R14.1
DB15-1-7: DB15-1.7
DB15-1-8: DB15-1.8 R18.2 R20.1
DB15-1-10: DB15-1.10
DB15-1-11: DB1.3 DB15-1.11 R24.2 R26.1
DB15-1-12: DB15-1.12
DB15-1-13: DB15-1.13 R30.2 R32.1
DB15-1-15: DB15-1.15 R31.2 R33.1
DB15-2-1: DB1.5 DB15-2.1 R36.2 R38.1
DB15-2-2: DB15-2.2
DB15-2-3: DB15-2.3 R42.2 R44.1
DB15-2-5: DB1.8 DB15-2.5 R48.2 R50.1
DB15-2-6: DB1.6 DB15-2.6 R37.2 R39.1
DB15-2-7: DB15-2.7
DB15-2-8: DB15-2.8 R43.2 R45.1
DB15-2-10: DB15-2.10
DB15-2-11: DB1.7 DB15-2.11 R49.2 R51.1
DB15-2-12: DB15-2.12
DB15-2-13: DB15-2.13 R55.2 R57.1
DB15-2-15: DB15-2.15 R54.2 R56.1
EXTENSION_TO_MAIN: R83.2 R88.2 U36.4(CX OR CY) U36.14(AX OR AY) U36.15(BX OR BY) U38.4(CX OR CY) U38.14(AX OR AY) U38.15(BX OR BY) U42.14(AX OR AY) U42.15(BX OR BY)
KEY_ADC1: PORT4.14 U52.16(TIM1_CH1N/AIN0/(HS)PB0)
KEY_ADC2: PORT4.16 U52.15(TIM1_CH2N/AIN1/(HS)PB1)
LED1: PORT4.4 U7.22(IO20)
LED2: PORT4.5 U7.21(IO21)
LED3: PORT4.6 U7.20(IO22)
LED4: PORT4.7 U7.19(IO23)
LED5: PORT4.8 U7.18(IO24)
LED6: PORT4.9 U7.15(IO25)
LED7: PORT4.10 U7.14(IO26)
LED8: PORT4.11 U7.13(IO27)
LED_ALL: PORT4.18 U7.12(IO28)
LED_MUTE: PORT4.12 Q33.1(G) R134.2 R196.2 U52.8(PF4)
MASTER_NOISE_IN: C97.2 POT1.1(A)
MASTER_SOUND_OUT: R130.1 R145.2 U35.1(BY) U35.3(CY) U35.13(AY) U37.1(BY) U37.3(CY) U37.13(AY) U41.1(BY) U41.13(AY)
NRESET: C422.2 R213.1 U7.39(GCLRN)
NRST: C421.2 R195.1 U52.1(NRST) UART_2.3
S_OUT: C98.2 J19.2 J19.4
STM_CLK: J21.5 U52.18(PC1(HS)/TIM1_CH1/UART1_CK) U400.6(CLK)
STM_RXD: J21.2 U52.31(PD6(HS)/UART1_RX) U400.7(RST)
STM_SW_1: R194.2 U7.23(IO19) U52.21(PC4(HS)/TIM1_CH4/CLK_CCO)
STM_SW_2: R192.2 U7.25(IO18) U52.22(PC5(HS)/SPI_SCK)
STM_SW_3: R193.2 U7.27(IO17) U52.23(PC6(HS)/SPI_MOSI)
STM_SW_4: R191.2 U7.28(IO16) U52.24(PC7(HS)/SPI_MISO)
STM_SW_5: R190.2 U7.31(IO14) U52.12(I2C_SCL/(T) PB4)
STM_SW_6: R189.2 U7.33(IO13) U52.11(I2C_SDA/(T)PB5)
STM_SW_7: R188.2 U7.34(IO12) U52.10(PB6)
STM_SW_8: R187.2 U7.35(IO11) U52.9(PB7)
STM_TXD: J21.3 U52.30(PD5(HS)/UART1_TX) U400.3(I/O)
SWIM: U52.26(PD1(HS)/SWIM) UART_2.2
N16780390: Q2.1 R15.2
N16780549: Q4.1 R21.2
N16780755: Q1.1 R14.2
N16780825: Q3.1 R20.2
N16781108: Q5.1 R26.2
N16781190: Q7.1 R32.2
N16781431: Q6.1 R27.2
N16781516: Q8.1 R33.2
N16939954: Q9.1 R38.2
N16940040: Q11.1 R44.2
N16940100: Q10.1 R39.2
N16940156: Q12.1 R45.2
N16940224: Q14.1 R51.2
N16940312: Q16.1 R57.2
N16940370: Q13.1 R50.2
N16940454: Q15.1 R56.2
N17770113: C87.1 C95.1 R80.1 U21.1(OUT)
N17770221: C128.1 R113.2 R115.2
N17770272: C87.2 R80.2 R83.1 U21.2(-IN)
N17770352: C89.2 R81.1 R86.2 U22.7(OUT)
N17770361: C119.1 R99.2 R103.2
N17770363: C129.1 R111.2 R117.2
N17770421: C120.1 R100.2 R104.2
N17770455: C97.1 C107.1 R93.2 U21.7(OUT)
N17770595: C95.2 R84.2 R89.2
N17770605: C107.2 R93.1 R94.1 U21.6(-IN)
N17770613: C118.2 R98.2
N17770625: C91.1 R87.2 U22.2(-IN)
N17770691: C102.1 R82.2 R86.1 R87.1
N17770715: C130.1 R116.2 R118.2
N17770771: C127.1 R112.2 R114.2
N17770777: C91.2 C96.2 R82.1 U22.1(OUT)
N17770857: C121.1 R101.2 R105.2
N17770987: C101.1 R81.2 R84.1 R85.1
N17771129: C122.1 R102.2 R106.2
N17771163: C96.1 R91.2 U21.5(+IN)
N17771502: R92.1 U21.3(+IN)
N17771820: C89.1 R85.2 U22.6(-IN)
N17777137: C141.1 R120.2 R122.1 R123.1
N17777289: C132.1 R123.2 U25.6(-IN)
N17777373: C132.2 R120.1 R126.2 U25.7(OUT)
N17777569: C135.1 R127.2 U25.2(-IN)
N17777571: C135.2 C139.1 R121.1 U25.1(OUT)
N17777623: C146.1 R131.2 R133.2
N17777844: C131.1 R119.2 R132.1 U26.2(-IN)
N17777947: C142.1 R121.2 R126.1 R127.1
N17778169: C155.2 R138.1 U28.3(+IN)
N17778207: C131.2 C138.2 R119.1 U26.1(OUT)
N17778744: C137.1 J20.2 J20.4 R131.1
N17779260: H6.1 J20.3 J20.5 R124.2
N17779350: C138.1 R122.2 R128.1
N17779980: C137.2 R125.2 U26.3(+IN)
N17792561: C123.2 R107.2
N17797730: C116.2 R96.2
N17797771: C124.2 R108.2
N17798296: C125.2 R109.2
N17798313: C115.2 R95.2
N17838744: C166.2 R141.1 U31.3(+IN)
N17840783: C156.2 R139.1 U29.3(+IN)
N17841454: C157.2 R140.1 U30.3(+IN)
N17842126: C167.2 R142.1 U32.3(+IN)
N17842799: C168.2 R143.1 U33.3(+IN)
N17843473: C169.2 R144.1 U34.3(+IN)
N17846952: C140.1 C148.1 R135.2 U26.7(OUT)
N17846954: C148.2 R135.1 R136.1 U26.6(-IN)
N17855871: C140.2 R145.1
N18063483: C154.2 R137.1 U27.3(+IN)
N18152633: C98.1 U24.5(OUT)
N18152660: POT1.2(WIPER) U24.3(+IN)
N18220117: C406.1 C407.1 U47.5(OUT)
N18220147: C407.2 R164.1
N18225514: C406.2 H5.1
N18229649: J19.3 J19.5 R165.2 R166.1
N18240245: C409.1 U47.1(GAIN)
N18240264: C409.2 U47.8(GAIN1)
N18244142: R166.2 R167.1 U47.3(+IN)
N18302677: C6.2 SOUND_OUT1.2
N18302745: C8.2 SOUND_OUT1.6
N18302749: C10.2 SOUND_OUT1.10
N18302787: C12.2 SOUND_OUT1.14
N18332153: Q33.3(D1) R133.1
N18366094: C418.2 U52.5(VCAP)
N18440182: H7.2 U402.2(AC_IN2) U403.2(AC_IN2)
N18440192: H7.1 U402.1(AC_IN1) U403.1(AC_IN1)
N168846912: Q11.3 R40.1
N168847322: Q14.3 R47.1
N168847492: Q15.3 R52.1
N168847582: Q9.3 R34.1
N168848072: Q12.3 R41.1
N168848572: Q13.3 R46.1
N168849062: Q10.3 R35.1
N168849312: Q16.3 R53.1
N168853950: Q1.3 R10.1
N168854042: Q7.3 R28.1
N168855012: Q8.3 R29.1
N168855262: Q5.3 R22.1
N168855692: Q2.3 R11.1
N168856102: Q6.3 R23.1
N168856352: Q3.3 R16.1
N168856522: Q4.3 R17.1
N177715271: C117.2 R97.2
N177716581: C126.2 R110.2
N183026911: C7.2 SOUND_OUT1.4
N183027071: C9.2 SOUND_OUT1.8
N183027151: C13.2 SOUND_OUT1.16
N183027311: C11.2 SOUND_OUT1.12

Pads without a net: MIC_IN1 17 18; NOREF#2 1; NOREF#3 1; PORT4 17; SOUND_OUT1 17 18; U7 37 42; U24 1 7 8; U27 1 7 8; U28 1 7 8; U29 1 7 8; U30 1 7 8; U31 1 7 8; U32 1 7 8; U33 1 7 8; U34 1 7 8; U35 2 5 12; U36 2 5 12; U37 2 5 12; U38 2 5 12; U41 2 3 4 5 9 12; U42 2 3 4 5 9 12; U47 7; U52 2 3 7 13 14 17 19 20 25 27 28 29 32; U400 2 4 5

## Via types
v1: diameter 0.711, hole 0.406, TOP to BOTTOM, 490 vias

## Routing (per net, layer and track width the routed paths; a pad name or vN(x,y) marks a point on that pad's centre or on a via; arc(x,y) is an arc through that point)
5V-1: length 278.7
  TOP w0.508: 111.39,44.56 v1(112,44.56) ; 111.39,44.56 U41.16 ; 111.39,44.56 112.01,45.19 112.01,46.74 112.31,47.03 ; U26.8 v1(90.27,42.06) ; 101.88,78.97 101.98,78.87 C103.2 103.5,80.34 103.38,80.47 ; C75.1 123.9,83.13 v1(124.94,84.18) U42.16 ; v1(126.62,63.37) v1(126.62,61.85) 125.92,61.15 U36.16 ; 112.31,47.03 v1(112.18,47.03) ; 112.31,47.03 C144.2 ; U38.16 v1(126.53,72.17) ; C136.2 113.92,22.61 v1(112.01,22.61) 110.67,21.26 U35.16 ; U37.16 v1(112,33.39)
  TOP w0.762: C413.2 83.77,34.59 v1(83.31,35.05) ; v1(83.31,35.05) 83.01,35.36 83.01,36.32 ; v1(83.31,35.05) 83.31,36.02 83.01,36.32 ; 83.01,36.32 U25.8 ; v1(103.38,84.07) 103.2,83.9 U21.8 ; U22.8 97.1,74.19 103.38,80.47 v1(103.38,81.15)
  TOP w1.27: v1(64.64,31.75) 64.77,31.88 C403.1 ; C405.1 59.16,32.49 v1(58.42,31.75)
  TOP w1.778: v1(64.64,31.75) v1(58.42,31.75) 45.28,31.75 U48.3 38.63,36.68
  BOTTOM w0.508: v1(112.18,47.03) 112.18,45.12 112.01,44.96 ; v1(112,44.56) 112,45.96 112.01,45.97 ; v1(112,33.39) 112,32.27 112.01,32.26 ; 126.62,71.37 126.53,71.46 v1(126.53,72.17)
  BOTTOM w0.762: v1(103.38,81.15) v1(103.38,84.07) 103.38,90.93 105.16,92.71 121.28,92.71 124.94,89.05 v1(124.94,84.18) 126.62,82.5 v1(126.62,63.37) v1(126.62,61.85) 126.62,61.59 112.01,46.99 v1(112.01,22.61) ; 83.31,21.21 v1(83.31,35.05) 83.31,37.21 86.49,40.39 88.6,40.39 v1(90.27,42.06)
  BOTTOM w1.27: v1(112.01,22.61) 110.62,21.21 75.44,21.21 68.9,27.75
  BOTTOM w1.778: 68.9,27.75 64.9,31.75 v1(64.64,31.75) v1(58.42,31.75)
5V-2: length 204.6
  TOP w0.508: C70.1 50.2,105.19 v1(49.91,104.9) 49.96,104.85 Q2.2 53.06,104.93 R13.1 ; R24.1 67.18,104.72 Q5.2 67.11,104.06 66.17,103.12 v1(66.17,102.11) ; R37.1 89.08,104.83 Q10.2 89.15,104.27 88.27,103.38 v1(88.27,102.11) ; R18.1 63.73,104.98 Q3.2 63.6,104.11 62.87,103.38 v1(62.87,102.11) ; R25.1 74.22,106.4 Q6.2 74.22,104.06 73.64,103.48 73.64,102.77 v1(73.79,102.62) ; R19.1 56.46,105.08 Q4.2 56.64,104.27 55.75,103.38 v1(55.75,102.11) ; R42.1 85.57,105.08 Q11.2 85.34,104.27 84.45,103.38 v1(84.45,102.11) ; v1(106.05,102.11) 107.29,103.35 Q15.2 107.29,106.2 R54.1 ; v1(91.82,102.11) 91.82,103.12 92.71,104.01 Q12.2 92.74,104.88 R43.1 ; R12.1 60.12,104.83 Q1.2 60.1,104.17 59.31,103.38 v1(59.31,102.11) ; R49.1 96.34,104.67 Q14.2 96.37,104.11 95.12,102.87 v1(95.12,102.11) ; v1(69.72,102.11) 69.72,103.12 70.66,104.06 Q7.2 70.74,104.83 R30.1 ; R31.1 78,104.72 Q8.2 77.98,103 v1(77.34,102.36) ; R55.1 100.25,105.08 Q16.2 99.92,104.11 98.93,103.12 v1(98.93,102.11) ; v1(102.49,102.11) 103.73,103.35 Q13.2 103.76,104.62 R48.1 ; R36.1 81.86,104.98 Q9.2 81.79,103 v1(81.41,102.62)
  TOP w1.27: 53.09,98.68 47.98,98.68 ; 25.65,101.44 25.69,101.47 v1(29.59,101.47)
  TOP w1.778: U401.3 47.98,102.97 v1(49.91,104.9) 47.88,106.93 36.56,106.93 C69.1 35.21,105.06 35.21,103.22 33.43,101.44 U18.3
  BOTTOM w0.508: v1(73.79,102.62) 74.55,102.62 75.06,102.11 75.31,102.36 v1(77.34,102.36) ; v1(81.41,102.62) 81.92,102.62 82.42,102.11
  BOTTOM w1.27: v1(29.59,101.47) 29.84,101.22 29.84,94.36
  BOTTOM w1.778: v1(49.91,104.9) 52.7,102.11 v1(55.75,102.11) v1(59.31,102.11) v1(62.87,102.11) v1(66.17,102.11) v1(69.72,102.11) v1(84.45,102.11) v1(88.27,102.11) v1(91.82,102.11) v1(95.12,102.11) v1(98.93,102.11) v1(102.49,102.11) v1(106.05,102.11)
5V-3: length 89
  TOP w0.305: R106.1 v1(128.96,61.29)
  TOP w0.508: R115.1 v1(129.13,84.1) ; R168.1 123.62,97.64 C86.1 ; R103.1 v1(129.08,70.41) ; R118.1 v1(128.96,93.78) ; R105.1 v1(128.96,89.1) ; R117.1 v1(128.91,74.93) ; R104.1 v1(128.93,79.65) ; R114.1 v1(128.91,65.91)
  TOP w1.016: 128.02,97.66 v1(128.91,98.55) 128.91,100.27 U45.3 ; 128.02,97.66 R168.1 123.65,101.78 123.95,102.08 ; 128.02,97.66 125.93,95.58 C86.1
  TOP w1.778: C84.1 120.29,102.08 U45.3
  BOTTOM w0.508: v1(128.91,74.93) 128.91,73.46 128.96,73.41 ; v1(128.91,65.91) 128.91,64.69 128.96,64.64 ; 128.96,68.2 129.08,68.33 v1(129.08,70.41) ; v1(129.13,84.1) 129.13,80.19 128.96,80.01 ; 128.96,96.27 128.91,96.32 v1(128.91,98.55) ; v1(128.93,79.65) 128.93,77.24 128.96,77.22
  BOTTOM w0.762: 128.96,98.81 v1(128.96,93.78) v1(128.96,89.1) v1(128.96,61.29)
5V-4: length 239.5
  TOP w0.508: U33.6 133.1,56.52 133.1,55.63 132.59,55.12 v1(125.73,55.12) 121.92,55.12 120.93,56.11 U34.6 ; 125.73,16.59 125.73,15.95 ; 125.73,16.59 v1(125.73,17.14) ; 125.73,16.59 125.09,15.95 125.73,15.95 ; 125.73,15.95 128.32,15.95 C412.1 ; 123.57,45.47 121.41,45.47 120.93,45.95 U32.6 ; 123.57,45.47 124.46,46.35 v1(125.73,46.35) 128.65,46.35 129.67,45.34 132.72,45.34 133.1,45.72 133.1,47.12 U31.6 ; 123.57,45.47 124.84,45.47 C111.2 ; U24.6 v1(72.06,17.7) ; 125.15,26.22 125.09,26.16 121.67,26.16 120.93,26.9 U28.6 ; 125.15,26.22 125.73,26.8 v1(125.73,27.43) 128.91,27.43 129.92,26.42 132.21,26.42 133.1,27.3 133.1,28.45 U27.6 ; 125.15,26.22 125.19,26.19 C416.2 ; 120.9,35.81 120.93,35.84 U30.6 ; 120.9,35.81 v1(125.73,35.81) 132.59,35.81 133.22,36.45 133.22,37.44 U29.6 ; 120.9,35.81 117.35,35.81 115.74,37.43 C110.2
  TOP w0.762: v1(125.73,17.14) 123.95,15.37 C181.1 ; v1(48.77,13.34) v1(52.32,13.34) 54.1,15.11 U47.6
  TOP w1.27: U51.3 40.35,13.37 C415.2
  TOP w1.778: v1(48.77,13.34) v1(45.85,13.34) 41.91,13.34 C415.2 39.88,12.57 37.85,14.61 37.85,17.27 38.84,18.26 U51.3
  BOTTOM w0.508: v1(72.06,17.7) 71.98,17.78
  BOTTOM w1.27: 56.52,17.78 125.09,17.78 v1(125.73,17.14) v1(125.73,27.43) v1(125.73,35.81) v1(125.73,46.35) v1(125.73,55.12)
  BOTTOM w1.778: 52.07,13.34 56.52,17.78 ; 52.07,13.34 v1(48.77,13.34) v1(45.85,13.34) ; 52.07,13.34 v1(52.32,13.34)
+12V: length 295.2
  TOP w0.762: 6.27,101.44 6.38,101.33 C73.1
  TOP w1.27: U48.1 40.35,41.27 34.67,41.27 32.77,39.37 32.77,25.65 35.56,22.86 U51.1
  TOP w1.778: 27.18,122.94 70.23,122.94 71.63,124.33 127.25,124.33 129.41,122.17 129.41,111.51 127.09,109.19 ; 27.18,122.94 27.43,122.68 C68.1 ; 27.18,122.94 8.26,122.94 6.27,120.95 6.27,101.44 U18.1 11.94,101.31 11.94,94.36 18.03,88.27 U403.3 18.03,46.86 20.57,44.32 31.62,44.32 34.67,41.27 ; 127.09,109.19 U45.1 125.32,106.68 124.41,107.59 126,109.19 127.09,109.19
-5V: length 283.2
  TOP w0.381: U25.4 78.84,45.97 78.69,46.13 C185.1
  TOP w0.508: 103.02,51.28 103.05,51.26 U41.7 103.05,48.84 ; v1(105.16,36.83) 103.63,36.83 103,37.46 103,38.8 U37.7 ; C414.2 v1(99.23,58.89) ; U26.4 94.44,40.34 v1(94.49,40.39) ; 103.33,29.92 103.05,29.64 103.05,29.29 ; U36.7 117.45,64.92 118.36,64.01 118.75,64.01 ; U22.4 101.27,68.15 100.58,68.83 v1(99.19,68.83) ; v1(117.73,88.52) 117.32,88.93 U42.7 117.32,95.35 C90.2 ; 103.05,27.94 U35.7 ; v1(119.89,75.06) 118.24,75.06 117.45,75.84 U38.7
  TOP w0.762: v1(117.73,88.52) v1(118.49,87.76) ; 103.05,27.94 103.05,29.29 C145.2 103.33,29.92 v1(104.01,30.61) ; v1(119.89,64.01) 118.75,64.01 ; v1(106.55,47.88) 105.28,46.61 v1(105.16,46.61) 105.16,46.74 103.05,48.84 ; v1(97.03,87.63) 96.98,87.68 U21.4 96.9,89.66 C134.2 ; v1(99.19,55.12) 103.02,51.28
  TOP w1.27: v1(29.34,18.67) 29.21,18.67 27.18,16.64 25.27,16.64 22.06,13.43 U15.3 ; U25.4 v1(78.84,41.05)
  BOTTOM w0.508: 119.82,73.79 119.89,73.85 v1(119.89,75.06) ; 119.89,65.21 119.82,65.28 ; v1(99.23,58.89) 99.23,60.03 99.19,60.07
  BOTTOM w0.762: 119.82,66.17 119.89,66.1 119.89,64.86 ; 119.82,66.17 119.82,86.42 v1(118.49,87.76) v1(117.73,88.52) ; 119.82,66.17 119.82,64.92 119.89,64.86 ; v1(105.16,46.61) 105.28,46.61 v1(106.55,47.88) 110.11,51.43 110.36,51.43 119.82,60.9 119.82,62.23 119.89,62.29 v1(119.89,64.01) 119.89,64.86 ; v1(97.03,87.63) 99.19,85.47 v1(99.19,68.83) v1(99.19,55.12)
  BOTTOM w1.27: 105.16,43.94 105.03,44.07 99.2,44.07 99.15,44.05 98.15,43.05 96.16,43.05 95.14,44.07 94.43,44.07 ; 105.16,43.94 v1(105.16,46.61) ; 105.16,43.94 v1(105.16,36.83) 105.16,31.75 v1(104.01,30.61) ; 94.43,44.07 78.99,44.07 ; 94.43,44.07 94.44,44.06 94.44,40.44 v1(94.49,40.39) ; 78.99,44.07 78.84,43.92 v1(78.84,41.05) ; 78.99,44.07 36.2,44.07 33.15,41.02 33.15,22.61 v1(32.19,21.65) 29.34,18.8 v1(29.34,18.67)
-12V: length 82
  TOP w0.305: 20.09,24.77 v1(20.95,24.77) ; v1(20.95,24.77) 21.82,24.77 ; v1(20.95,24.77) 20.95,25.63 ; v1(20.95,24.77) 20.95,23.9 ; v1(9.4,25.53) 10.26,25.53 ; v1(9.4,25.53) 9.4,26.39 ; v1(9.4,25.53) 9.4,24.66 ; v1(9.4,25.53) 8.53,25.53 ; v1(20.45,21.97) 20.45,22.83 ; v1(20.45,21.97) 21.31,21.97 ; v1(20.45,21.97) 19.58,21.97 ; v1(20.45,21.97) 20.45,21.11 ; 9.55,22.35 v1(10.41,22.35) ; v1(10.41,22.35) 10.41,21.49 ; v1(10.41,22.35) 10.41,23.22 ; v1(10.41,22.35) 11.28,22.35 ; v1(8.38,22.35) 8.38,23.22 ; v1(8.38,22.35) 8.38,21.49 ; v1(8.38,22.35) 7.52,22.35 ; v1(8.38,22.35) 9.25,22.35 ; v1(20.45,20.07) 21.31,20.07 ; v1(20.45,20.07) 20.45,20.93 ; v1(20.45,20.07) 20.45,19.2 ; v1(20.45,20.07) 19.58,20.07 ; 15.67,17.85 v1(15.67,21.4) ; 5.84,18.62 C182.2 ; 5.77,24.99 C183.1 6.76,23.98 ; v1(10.92,18.8) 10.92,19.66 ; v1(10.92,18.8) 10.06,18.8 ; v1(10.92,18.8) 10.92,17.93 ; v1(10.92,18.8) 11.79,18.8 ; v1(6.1,22.35) 6.96,22.35
  TOP w1.27: U402.5 18.54,39.5 15.67,36.62 15.67,30.48 ; 5.77,21.84 C183.1 ; 5.77,21.84 5.77,20.4 C182.2 ; 5.77,21.84 6.21,21.4 11.3,21.4
  TOP w1.778: 11.3,21.4 v1(13.39,21.4) v1(15.67,21.4) 19.16,21.4 ; 15.67,25.78 15.67,24.72 15.75,24.64 ; 15.67,25.78 15.75,25.7 15.75,24.64 ; 15.67,25.78 15.67,30.48 ; 15.75,24.64 v1(15.75,23.49) ; C182.2 9.14,20.32 9.27,20.45
  vias: v1(13.46,23.49) v1(13.46,19.05) v1(15.67,18.97) v1(17.78,23.49) v1(17.78,21.34) v1(17.91,18.92)
GND: length 2497.9
  TOP w0.305: v1(137.54,110.62) 137.54,111.48 ; v1(137.54,110.62) 137.54,109.75 ; v1(137.54,110.62) 138.4,110.62 ; v1(137.54,110.62) 136.68,110.62 ; v1(10.92,115.57) 10.92,116.43 ; v1(10.92,115.57) 11.79,115.57 ; v1(10.92,115.57) 10.06,115.57 ; v1(10.92,115.57) 10.92,114.71 ; 88.54,83.31 v1(89.41,83.31) ; v1(89.41,83.31) 89.41,82.45 ; v1(89.41,83.31) 90.06,83.96 90.06,83.93 v1(90.55,83.44) 90.55,82.58 ; 6.35,95.91 C73.2 ; C73.2 7.37,96.9 ; C73.2 5.33,96.9 ; 149.73,28.35 v1(149.73,29.21) 150.6,29.21 ; 108.33,96.62 108.33,94.64 ; 140.39,15.02 H2.1 ; H2.1 144.04,18.67 ; H2.1 147.7,15.02 ; v1(52.91,74.72) 53.78,74.72 ; v1(52.91,74.72) 52.91,73.86 ; v1(52.91,74.72) 52.05,74.72 ; v1(52.91,74.72) 52.91,75.59 ; v1(122.38,33.76) U30.4 123.39,31.55 ; v1(122.38,33.76) 122.38,34.62 ; v1(122.38,33.76) 122.91,33.22 R139.2 125.53,34.21 ; v1(122.38,33.76) 123.24,33.76 ; v1(140.42,25.83) 140.42,26.69 ; v1(140.42,25.83) 139.55,25.83 ; v1(140.42,25.83) 140.42,24.96 ; v1(140.42,25.83) 141.28,25.83 ; 103.45,23.94 v1(104.32,23.94) ; v1(104.32,23.94) 104.32,23.08 ; v1(104.32,23.94) U35.6 104.32,27.42 ; v1(104.32,23.94) 105.18,23.94 ; 148.13,83.75 v1(148.13,84.61) ; v1(148.13,84.61) 149,84.61 ; v1(148.13,84.61) 148.13,85.48 ; v1(148.13,84.61) MIC_IN1.3 144.75,84.61 ; 149.61,88.16 v1(149.61,89.03) 149.02,89.61 149.05,89.61 v1(149.73,90.3) ; v1(120.02,97.66) v1(119.79,97.66) ; v1(120.02,97.66) R168.2 ; v1(120.02,97.66) 120.02,96.8 ; v1(120.02,97.66) 120.02,98.53 ; v1(119.79,97.66) 118.92,97.66 ; v1(119.79,97.66) 119.79,98.53 ; v1(119.79,97.66) 119.79,96.8 ; v1(47.24,61.72) 48,60.96 U7.11 ; v1(47.24,61.72) 46.38,61.72 ; v1(47.24,61.72) 48.11,61.72 ; v1(47.24,61.72) 47.24,60.86 ; 48.33,42.44 48.33,40.95 ; v1(149.73,53.47) 149.86,53.34 ; v1(149.73,53.47) 149.73,54.33 ; v1(149.73,53.47) 150.6,53.47 ; v1(149.73,53.47) 149.05,52.78 v1(148.92,52.78) ; v1(137.54,20.7) 138.4,20.7 ; v1(137.54,20.7) 137.54,21.56 ; v1(137.54,20.7) 137.54,19.84 ; v1(137.54,20.7) 136.68,20.7 ; MIC_IN1.19 148.92,68.04 ; MIC_IN1.19 150.55,66.61 ; MIC_IN1.19 v1(148.92,66.6) ; 138.71,108.33 v1(139.57,108.33) ; v1(139.57,108.33) 139.57,107.47 ; v1(139.57,108.33) 139.57,109.19 ; 141.48,17.91 142.22,17.16 v1(142.22,16.78) ; v1(102.5,65.47) 102.5,66.33 ; v1(102.5,65.47) C102.2 ; v1(102.5,65.47) 101.64,65.47 ; v1(102.5,65.47) 103.37,65.47 ; v1(102.5,65.47) 102.18,65.15 100.08,65.15 99.82,65.41 U22.3 ; 50.19,24.51 v1(51.05,24.51) ; v1(51.05,24.51) 51.92,24.51 ; v1(51.05,24.51) 51.05,25.37 ; 111.96,103.25 C84.2 ; C84.2 115.37,103.25 ; C84.2 113.67,104.85 ; v1(85.12,36.78) C142.2 86.33,35.76 ; v1(85.12,36.78) 85.12,35.92 ; v1(85.12,36.78) 85.12,37.64 ; v1(85.12,36.78) 84.25,36.78 ; v1(148.13,72.61) MIC_IN1.15 144.75,72.61 ; v1(148.13,72.61) 148.13,71.75 ; v1(148.13,72.61) 149,72.61 ; v1(148.13,72.61) 148.13,73.48 ; C182.1 7.44,14.86 ; C182.1 5.84,16.56 ; C182.1 5.84,13.16 ; C182.1 2.54,14.86 2.29,15.11 2.29,22.48 3.81,24 C183.2 ; R89.1 110.82,67.01 v1(110.24,66.42) ; R89.1 111.81,67.72 ; R89.1 110.67,67.56 C101.2 108.94,65.58 v1(109.12,65.41) ; R89.1 111.3,68.2 116.2,68.2 ; U28.4 123.39,22.61 ; U28.4 123.98,24.21 R137.2 ; U28.4 122.38,23.88 ; U28.4 v1(122.38,21.39) ; v1(148.08,66.04) 148.66,66.61 148.65,66.61 v1(148.08,67.18) ; v1(148.08,66.04) 148.08,65.18 ; v1(148.08,66.04) 147.22,66.04 ; 24,114.71 v1(24,115.57) ; v1(24,115.57) 23.14,115.57 ; v1(24,115.57) 24.87,115.57 ; v1(24,115.57) 24,116.43 ; 102.96,57.85 C414.1 ; C414.1 102.96,59.27 v1(103.63,59.94) ; C414.1 103.95,58.86 ; v1(99.57,26.15) 99.57,27.01 ; v1(99.57,26.15) 98.7,26.15 ; v1(99.57,26.15) 99.57,25.29 ; v1(99.57,26.15) U35.8 ; 147.85,61.59 v1(148.72,61.59) ; v1(148.72,61.59) 148.72,62.46 ; v1(148.72,61.59) 149.58,61.59 ; v1(148.72,61.59) 148.72,60.73 ; v1(133.73,122.43) 133.73,123.29 ; v1(133.73,122.43) 133.73,121.56 ; v1(133.73,122.43) 132.87,122.43 ; v1(133.73,122.43) 134.59,122.43 ; 34.23,116.76 v1(35.1,116.76) ; v1(35.1,116.76) 35.96,116.76 ; v1(35.1,116.76) 35.1,117.62 ; v1(35.1,116.76) 35.1,115.9 ; v1(32.89,116.84) 32.89,117.7 ; v1(32.89,116.84) 32.89,115.98 ; v1(32.89,116.84) 33.76,116.84 ; v1(32.89,116.84) 32.03,116.84 ; MIC_IN1.1 v1(148.13,86.61) ; MIC_IN1.1 144.75,86.61 ; MIC_IN1.1 145.92,87.43 ; v1(148.13,86.61) 148.13,87.48 ; v1(148.13,86.61) 148.13,85.75 ; v1(148.13,86.61) 149,86.61 ; v1(117.6,13.08) 118.47,13.08 ; v1(117.6,13.08) 117.6,12.22 ; v1(117.6,13.08) 116.74,13.08 ; 136.19,68.71 v1(135.33,68.71) C119.2 133.1,68.71 ; 80.77,10.44 v1(80.77,11.3) ; v1(80.77,11.3) 79.91,11.3 ; v1(80.77,11.3) 80.77,12.17 ; v1(80.77,11.3) 81.64,11.3 ; 95.28,58.67 v1(96.14,58.67) ; v1(96.14,58.67) 97,58.67 ; v1(96.14,58.67) 96.14,59.54 ; v1(20.95,110.24) 20.95,111.1 ; v1(20.95,110.24) 20.09,110.24 ; v1(20.95,110.24) 20.95,109.37 ; v1(20.95,110.24) 21.82,110.24 ; v1(35.18,59.94) 35.18,60.81 ; v1(35.18,59.94) 35.18,59.08 ; v1(35.18,59.94) 36.04,59.94 ; v1(35.18,59.94) 34.32,59.94 ; 140.23,21.21 v1(141.1,21.21) ; v1(141.1,21.21) 141.1,22.07 ; v1(141.1,21.21) 141.96,21.21 ; v1(141.1,21.21) 141.1,20.35 ; v1(147.92,43.78) v1(147.92,45.78) ; v1(147.92,43.78) SOUND_OUT1.7 144.75,43.78 ; v1(147.92,43.78) 148.79,43.78 ; v1(147.92,43.78) v1(147.92,41.78) ; v1(147.92,45.78) 148.79,45.78 ; v1(147.92,45.78) v1(147.92,47.78) ; v1(147.92,45.78) SOUND_OUT1.5 144.75,45.78 ; 110.24,77.11 v1(110.24,77.98) ; v1(110.24,77.98) 111.1,77.98 ; v1(110.24,77.98) 110.24,78.84 ; v1(110.24,77.98) 109.37,77.98 ; 135.13,73.08 C129.2 v1(132.89,73.08) ; v1(145.29,56.9) 146.15,56.9 ; v1(145.29,56.9) 144.42,56.9 ; v1(145.29,56.9) 145.29,57.76 ; v1(145.29,56.9) 145.29,56.03 ; 101.27,71.35 U22.5 v1(103.48,72.62) 103.48,71.75 ; 55.1,38.53 v1(55.96,38.53) ; v1(55.96,38.53) 55.96,39.39 ; v1(55.96,38.53) 55.96,37.66 ; v1(55.96,38.53) 56.82,38.53 ; 41.48,101.6 H3.1 ; H3.1 42.39,97.03 ; H3.1 42.39,104.34 ; H3.1 42.04,100.69 41.94,100.58 v1(39.88,100.58) 39.88,99.53 v1(40.62,98.79) 41.37,98.04 v1(42.42,98.04) 43.47,98.04 v1(44.21,98.79) 44.96,99.53 v1(44.96,100.58) 44.96,101.64 v1(44.21,102.38) 43.47,103.12 v1(42.42,103.12) 41.37,103.12 v1(40.62,102.38) ; H3.1 46.05,100.69 ; v1(119.93,108.63) 119.93,109.49 ; v1(119.93,108.63) 120.8,108.63 ; v1(119.93,108.63) 119.93,107.77 ; v1(119.93,108.63) 119.07,108.63 ; C403.2 66.37,41.27 ; C403.2 64.77,42.98 ; C403.2 64.77,39.57 ; v1(67.94,15.49) 67.94,14.1 68.33,13.72 ; v1(67.94,15.49) 68.81,15.49 ; v1(67.94,15.49) 67.94,16.36 ; 47.2,66.66 v1(47.2,67.52) ; v1(47.2,67.52) 48.07,67.52 ; v1(47.2,67.52) 46.34,67.52 ; 143.28,58.67 v1(144.15,58.67) ; v1(144.15,58.67) 144.15,59.54 ; v1(144.15,58.67) 145.01,58.67 ; v1(144.15,58.67) 144.15,57.81 ; 75.59,57.91 v1(76.45,57.91) ; v1(76.45,57.91) 77.32,57.91 ; v1(76.45,57.91) 76.45,57.05 ; v1(76.45,57.91) 76.45,58.78 ; DB15-2.17 104.18,115.04 ; DB15-2.17 101.45,117.77 ; DB15-2.17 98.72,115.04 ; 36.9,62.35 U7.40 ; v1(147.78,60.41) 148.65,60.41 ; v1(147.78,60.41) 147.78,61.27 ; v1(147.78,60.41) 146.92,60.41 ; v1(147.78,60.41) 147.78,59.54 ; 114.1,89.38 v1(114.1,90.25) ; v1(114.1,90.25) 114.1,91.11 ; v1(114.1,90.25) 114.96,90.25 ; v1(114.1,90.25) R88.1 ; 116.87,108.71 v1(117.73,108.71) ; v1(117.73,108.71) 117.73,107.85 ; v1(117.73,108.71) 118.59,108.71 ; v1(117.73,108.71) 117.73,109.58 ; v1(135.23,59.41) 135.23,60.27 ; v1(135.23,59.41) C122.2 132.99,59.41 ; v1(135.23,59.41) 136.09,59.41 ; 58.95,14.35 v1(59.82,14.35) 59.82,13.49 ; v1(98.3,15.62) 98.3,16.48 ; v1(98.3,15.62) 98.17,15.49 R124.1 ; v1(98.3,15.62) 99.16,15.62 ; v1(98.3,15.62) 98.3,14.76 ; 29.65,78.4 v1(29.65,79.26) 29.65,80.12 ; C110.1 113.8,38.47 ; C110.1 112.81,37.45 ; C110.1 113.7,37.35 v1(113.7,36.32) ; v1(90.81,85.09) 90.06,84.35 90.06,84.31 v1(89.41,84.96) ; v1(90.81,85.09) 91.67,85.09 ; v1(90.81,85.09) 90.81,85.95 ; v1(80.9,57.78) 80.9,58.65 ; v1(80.9,57.78) 80.9,56.92 ; v1(80.9,57.78) 80.04,57.78 ; v1(80.9,57.78) 81.76,57.78 ; v1(54.36,73.66) 54.36,74.52 ; v1(54.36,73.66) 53.49,73.66 ; v1(54.36,73.66) 55.22,73.66 ; v1(54.36,73.66) 54.36,72.8 ; 9.4,116.74 v1(9.4,117.6) ; v1(9.4,117.6) 10.26,117.6 ; v1(9.4,117.6) 8.53,117.6 ; v1(9.4,117.6) 9.4,118.47 ; v1(103.63,59.94) 104.5,59.94 ; v1(103.63,59.94) 102.77,59.94 ; v1(135.81,41.33) 136.68,41.33 ; v1(135.81,41.33) U31.4 134.59,42.6 ; v1(135.81,41.33) 135.81,40.46 ; v1(135.81,41.33) 135.81,42.19 ; U25.5 78.84,38.81 ; U25.5 v1(78.84,36.32) 78.84,35.46 ; U25.5 77.83,37.54 ; DB15-1.16 43,117.72 ; DB15-1.16 40.27,114.99 ; DB15-1.16 45.73,114.99 ; DB15-1.16 43,112.26 ; 19.43,114.71 v1(19.43,115.57) ; v1(19.43,115.57) 18.57,115.57 ; v1(19.43,115.57) 20.29,115.57 ; v1(19.43,115.57) 19.43,116.43 ; v1(148.97,23.11) 148.97,23.98 ; v1(148.97,23.11) 148.11,23.11 ; v1(148.97,23.11) 148.97,22.25 ; v1(148.97,23.11) 149.83,23.11 ; 28.6,77.47 v1(29.46,77.47) ; v1(29.46,77.47) 29.46,78.33 ; v1(29.46,77.47) 29.46,76.61 ; v1(107.57,74.8) 108.43,74.8 ; v1(107.57,74.8) 107.57,73.94 ; v1(107.57,74.8) 107.57,75.67 ; v1(107.57,74.8) 106.71,74.8 ; PORT2.19 67.06,85.87 ; PORT2.19 65.64,84.25 ; PORT2.19 v1(67.06,84.25) ; PORT2.19 v1(67.06,84.25) ; PORT2.19 67.06,82.62 ; 60.45,71.78 v1(60.45,72.64) 59.59,72.64 ; 78.23,9.42 v1(78.23,10.29) ; v1(78.23,10.29) 77.37,10.29 ; v1(78.23,10.29) 79.1,10.29 ; v1(78.23,10.29) 78.23,11.15 ; 145.92,50.6 SOUND_OUT1.1 v1(147.92,49.78) ; 42.41,70.25 U7.30 42.41,63.61 v1(41.78,62.99) ; U52.4 40.04,80.02 ; 52.52,36.4 v1(53.39,36.4) ; v1(53.39,36.4) 53.39,35.54 ; v1(53.39,36.4) 54.25,36.4 ; v1(53.39,36.4) 53.39,37.27 ; 132.03,73.08 v1(132.89,73.08) ; v1(132.89,73.08) 132.89,73.94 ; 148.59,57.68 v1(148.59,58.55) ; v1(148.59,58.55) 147.73,58.55 ; v1(148.59,58.55) 149.45,58.55 ; v1(148.59,58.55) 148.59,59.41 ; v1(89.26,29.95) 89.26,30.81 ; v1(89.26,29.95) 90.12,29.95 ; v1(89.26,29.95) 89.89,30.58 R132.2 91.8,29.59 ; v1(89.26,29.95) R128.2 ; v1(89.26,29.95) 89.26,29.08 ; v1(13.21,115.57) 14.07,115.57 ; v1(13.21,115.57) 12.34,115.57 ; v1(13.21,115.57) 13.21,116.43 ; v1(13.21,115.57) 13.21,114.71 ; U34.2 119.66,52.68 v1(119.63,52.7) ; v1(116.2,48.51) 115.68,47.99 C144.1 ; v1(116.2,48.51) 117.07,48.51 ; v1(116.2,48.51) 115.34,48.51 ; U27.4 135.61,22.66 ; U27.4 134.59,23.93 ; U27.4 v1(134.59,20.8) ; 27.85,78.14 C421.1 27.85,80.18 ; 100.96,38.85 U37.8 ; U37.8 v1(101.78,40.72) ; U37.8 101.78,37.58 ; v1(83.57,78.11) 84.43,78.11 ; v1(83.57,78.11) 83.57,77.24 ; v1(83.57,78.11) 82.7,78.11 ; v1(83.57,78.11) 83.57,78.97 ; v1(134.59,33.88) 135.46,33.88 ; v1(134.59,33.88) U29.4 135.61,31.67 ; v1(134.59,33.88) 134.59,34.75 ; 100.58,26.87 v1(100.58,27.74) ; v1(100.58,27.74) 99.72,27.74 ; v1(100.58,27.74) C145.1 ; v1(100.58,27.74) 101.45,27.74 ; v1(142.37,23.24) 142.37,24.1 ; v1(142.37,23.24) 143.23,23.24 ; v1(142.37,23.24) 141.5,23.24 ; v1(142.37,23.24) 142.37,22.38 ; C422.1 33.93,65.76 ; C422.1 33.05,65.66 34.54,65.66 v1(35.31,64.9) ; C422.1 32.94,66.78 ; C416.1 v1(128.5,26.16) 128.5,25.3 ; 113.06,15.37 v1(113.92,15.37) ; v1(113.92,15.37) 113.92,14.5 ; v1(113.92,15.37) 113.92,16.23 ; v1(73.33,29.26) U24.2 73.33,32.26 ; v1(73.33,29.26) 72.47,29.26 ; v1(73.33,29.26) 74.19,29.26 ; 135.25,109.75 v1(135.25,110.62) ; v1(135.25,110.62) 136.12,110.62 ; v1(135.25,110.62) 134.39,110.62 ; v1(135.25,110.62) 135.25,111.48 ; R129.2 86.36,46.99 84.2,49.15 v1(84.2,54.1) ; C413.1 88.16,35.59 ; C413.1 v1(89.38,34.57) ; C413.1 88.16,33.55 ; v1(144.15,102.87) 145.01,102.87 ; v1(144.15,102.87) 144.15,103.73 ; v1(144.15,102.87) 143.28,102.87 ; v1(144.15,102.87) 144.15,102.01 ; 136.63,18.46 v1(137.5,18.46) ; v1(137.5,18.46) 137.5,19.32 ; v1(137.5,18.46) 137.5,17.6 ; v1(137.5,18.46) 138.36,18.46 ; v1(71.93,78.02) 71.93,78.89 ; v1(71.93,78.02) 71.06,78.02 ; v1(71.93,78.02) 72.79,78.02 ; C86.2 121.79,96.62 ; C86.2 121.79,94.59 ; C86.2 v1(119.58,95.61) ; 29.55,79.16 31.13,79.16 C418.1 31.24,79.25 C21.2 31.24,76.45 ; 123.98,81.31 C75.2 122.96,80.54 v1(122.43,80.01) ; 34.04,10.92 33.42,10.31 v1(33.42,10.14) 34.16,10.89 v1(34.16,11.94) 34.16,12.99 v1(33.42,13.73) 32.68,14.48 v1(31.62,14.48) 30.57,14.48 v1(29.83,13.73) 29.08,12.99 v1(29.08,11.94) ; 40.16,78.23 v1(41.02,78.23) 41.88,78.23 ; 143.66,23.24 v1(144.53,23.24) ; v1(144.53,23.24) 145.39,23.24 ; v1(144.53,23.24) 144.53,22.38 ; v1(144.53,23.24) 144.53,24.1 ; U47.4 61.85,17.58 ; 37.47,93.12 J21.1 ; J21.1 37.47,95.61 ; J21.1 36.22,94.36 ; J21.1 38.71,94.36 ; v1(82.93,10.03) 82.93,10.9 ; v1(82.93,10.03) 82.93,9.17 ; v1(82.93,10.03) 83.79,10.03 ; v1(82.93,10.03) 82.07,10.03 ; 144.04,104.66 H1.1 147.7,108.32 ; v1(135.18,91.95) 135.18,92.81 ; v1(135.18,91.95) 136.04,91.95 ; v1(135.18,91.95) C130.2 132.94,91.95 ; v1(35.31,64.9) 36.17,64.9 ; v1(35.31,64.9) 34.44,64.9 ; v1(35.31,64.9) 35.31,64.03 ; v1(142.22,16.78) 141.48,16.04 v1(141.48,14.99) 141.48,13.93 v1(142.22,13.19) ; v1(142.22,16.78) 143.27,16.78 v1(144.02,17.53) 144.76,16.78 v1(145.81,16.78) 145.81,15.73 v1(146.56,14.99) 145.81,14.24 v1(145.81,13.19) 145.07,12.45 v1(144.02,12.45) ; v1(134.59,20.8) 135.46,20.8 ; v1(134.59,20.8) 134.59,19.94 ; v1(134.59,20.8) 133.73,20.8 ; v1(90.06,84.25) 90.06,85.87 ; v1(90.06,84.25) 88.64,84.25 ; v1(90.06,84.25) 90.06,82.62 ; v1(90.06,84.25) 89.41,84.9 v1(89.41,84.96) ; 107.19,79.4 v1(107.19,80.26) ; v1(107.19,80.26) 107.19,81.13 ; v1(107.19,80.26) 108.05,80.26 ; v1(107.19,80.26) 106.32,80.26 ; v1(20.95,105.92) 21.82,105.92 ; v1(20.95,105.92) 20.09,105.92 ; v1(20.95,105.92) 20.95,106.78 ; v1(20.95,105.92) 20.95,105.05 ; v1(89.41,84.96) 88.54,84.96 ; v1(89.41,84.96) 89.41,85.83 ; 35.56,46.13 v1(35.56,46.99) ; v1(35.56,46.99) 35.56,47.85 ; v1(35.56,46.99) 34.7,46.99 ; 148.13,79.75 v1(148.13,80.61) ; v1(148.13,80.61) MIC_IN1.7 144.75,80.61 ; v1(148.13,80.61) 148.13,81.48 ; v1(148.13,80.61) 149,80.61 ; 123.7,109.63 v1(123.7,110.49) ; v1(123.7,110.49) 124.56,110.49 ; v1(123.7,110.49) 122.83,110.49 ; v1(123.7,110.49) 123.7,111.35 ; v1(115.09,97.99) 115.95,97.99 ; v1(115.09,97.99) 115.09,98.86 ; v1(115.09,97.99) 114.22,97.99 ; v1(115.09,97.99) C90.1 ; 69.25,87.25 PORT2.18 ; PORT2.18 v1(70.06,85.04) ; PORT2.18 70.06,88.42 ; 143.41,61.72 v1(144.27,61.72) ; v1(144.27,61.72) 145.14,61.72 ; v1(144.27,61.72) 144.27,60.86 ; v1(144.27,61.72) 144.27,62.59 ; 66.29,82.58 v1(66.29,83.44) ; v1(66.29,83.44) 65.43,83.44 ; v1(66.29,83.44) 66.29,83.48 v1(67.06,84.25) ; v1(66.29,83.44) 66.56,83.44 67.06,83.94 67.06,84.07 v1(67.69,83.44) ; 144.75,78.61 MIC_IN1.9 v1(148.13,78.61) ; v1(148.92,52.78) 148.67,52.78 v1(148.08,52.2) ; v1(148.92,52.78) 148.92,51.36 ; v1(148.92,52.78) 148.92,54.21 ; 114.3,14.5 v1(114.3,15.37) 114.3,16.23 ; 37.34,115.85 v1(37.34,116.71) ; v1(37.34,116.71) 37.34,117.58 ; v1(37.34,116.71) 38.2,116.71 ; v1(37.34,116.71) 36.47,116.71 ; v1(37.47,27.3) 37.47,28.17 ; v1(37.47,27.3) 37.47,26.44 ; v1(37.47,27.3) 36.6,27.3 ; v1(37.47,27.3) 38.33,27.3 ; 62.79,50.23 PORT4.19 59.54,50.23 ; 133.22,109.75 v1(133.22,110.62) ; v1(133.22,110.62) 133.22,111.48 ; v1(133.22,110.62) 134.09,110.62 ; v1(133.22,110.62) 132.36,110.62 ; 104.27,13.74 H6.2 ; H6.2 105.51,14.99 ; H6.2 105.51,12.5 ; H6.2 106.76,13.74 ; 80.64,39.4 v1(80.64,40.26) ; v1(80.64,40.26) 81.51,40.26 ; v1(80.64,40.26) 80.64,41.12 ; v1(80.64,40.26) 79.78,40.26 ; 76.16,29.78 v1(77.03,29.78) ; v1(77.03,29.78) 77.24,30 C141.2 ; v1(77.03,29.78) 77.03,30.65 ; 31.24,49.43 UART_2.1 ; UART_2.1 32.49,50.67 ; UART_2.1 30,50.67 ; UART_2.1 31.24,51.92 ; v1(52.96,76.96) 53.82,76.96 ; v1(52.96,76.96) 52.1,76.96 ; v1(52.96,76.96) 52.96,77.83 ; v1(52.96,76.96) 52.96,76.1 ; SOUND_OUT1.3 v1(147.92,47.78) ; v1(147.92,47.78) v1(147.92,49.78) ; v1(147.92,47.78) 148.79,47.78 ; v1(119.25,110.62) 120.12,110.62 ; v1(119.25,110.62) 119.25,111.48 ; v1(119.25,110.62) 118.39,110.62 ; v1(119.25,110.62) 119.25,109.75 ; 61.17,74.65 PORT4.20 61.17,71.81 ; 143.08,56.11 v1(143.08,56.98) ; v1(143.08,56.98) 143.08,57.84 ; v1(143.08,56.98) 143.95,56.98 ; v1(143.08,56.98) 142.22,56.98 ; 108.13,55.88 R130.2 ; R130.2 v1(109.12,65.41) ; R130.2 110.11,55.88 ; v1(85.77,78.02) 85.77,78.89 ; v1(85.77,78.02) 84.91,78.02 ; v1(85.77,78.02) 86.63,78.02 ; 69.72,77.24 v1(69.72,78.11) ; v1(69.72,78.11) 70.59,78.11 ; v1(69.72,78.11) 69.72,78.97 ; v1(69.72,78.11) 68.86,78.11 ; 135.07,106.37 135.07,107.84 ; U32.2 v1(119.66,43.66) 118.8,43.66 ; 147.22,30.35 v1(148.08,30.35) ; v1(148.08,30.35) 148.08,31.22 ; v1(148.08,30.35) 148.65,29.78 148.78,29.78 v1(148.08,29.08) ; R144.2 v1(113.16,52.32) ; v1(122.17,108.59) 123.04,108.59 ; v1(122.17,108.59) 121.31,108.59 ; v1(122.17,108.59) 122.17,109.45 ; v1(122.17,108.59) 122.17,107.72 ; v1(148.13,76.61) 148.13,77.48 ; v1(148.13,76.61) MIC_IN1.11 144.75,76.61 ; v1(148.13,76.61) 149,76.61 ; v1(148.13,76.61) 148.13,75.75 ; 147.22,90.3 v1(148.08,90.3) 148.08,91.16 ; v1(137.41,16.26) 138.28,16.26 ; v1(137.41,16.26) 136.55,16.26 ; v1(137.41,16.26) 137.41,15.39 ; v1(137.41,16.26) 137.41,17.12 ; 52.63,91.16 v1(52.63,92.02) ; v1(52.63,92.02) 53.49,92.02 ; v1(52.63,92.02) 51.77,92.02 ; v1(147.92,37.78) 148.79,37.78 ; v1(147.92,37.78) SOUND_OUT1.13 144.75,37.78 ; v1(147.92,37.78) v1(147.92,35.78) ; v1(147.92,37.78) v1(147.92,39.78) ; J20.1 89.99,3.51 ; J20.1 91.87,1.63 ; J20.1 88.11,1.63 ; v1(110.24,66.42) 110.24,65.56 ; v1(110.24,66.42) 111.1,66.42 ; v1(110.24,66.42) 109.37,66.42 ; 91.87,27.56 R125.1 ; R125.1 91.87,29.54 ; R125.1 91.29,28.55 v1(90.81,28.07) ; 115.09,94.77 C90.1 ; C90.1 114.1,95.78 ; 144.75,39.78 SOUND_OUT1.11 v1(147.92,39.78) ; 109.86,80.54 v1(109.86,81.41) ; v1(109.86,81.41) 110.72,81.41 ; v1(109.86,81.41) 108.99,81.41 ; v1(109.86,81.41) 109.86,82.27 ; 69.2,85.04 v1(70.06,85.04) ; v1(70.06,85.04) 70.06,84.18 ; U33.2 131.88,52.02 v1(131.7,52.2) 130.84,52.2 ; 108.61,85.47 R94.2 ; R94.2 v1(109.6,86.23) ; R94.2 110.59,85.47 ; DB15-1.9 57.48,115.84 ; C70.2 51.24,108.01 ; C70.2 49.21,108.01 ; C70.2 v1(50.23,109.28) ; 125.35,117.27 DB1.9 124.18,118.44 ; 150.6,52.2 v1(149.73,52.2) 149.73,51.33 ; v1(90.81,28.07) 90.81,28.93 ; v1(90.81,28.07) 90.81,27.2 ; v1(90.81,28.07) 89.94,28.07 ; 115.32,78.71 v1(116.18,78.71) U38.8 ; v1(140.84,57.02) 140.84,57.89 ; v1(140.84,57.02) 141.71,57.02 ; v1(140.84,57.02) 140.84,56.16 ; v1(140.84,57.02) 139.98,57.02 ; v1(54.31,71.42) 54.31,72.28 ; v1(54.31,71.42) 53.45,71.42 ; v1(54.31,71.42) 54.31,70.56 ; v1(54.31,71.42) 55.17,71.42 ; 63.4,22.99 H5.2 ; H5.2 64.64,24.23 ; H5.2 65.89,22.99 ; H5.2 64.64,21.74 ; v1(78.69,57.87) 78.69,58.73 ; v1(78.69,57.87) 79.56,57.87 ; v1(78.69,57.87) 77.83,57.87 ; v1(78.69,57.87) 78.69,57 ; v1(134.59,52.35) U33.4 135.61,50.72 ; 105.05,75.44 v1(105.92,75.44) ; v1(105.92,75.44) 105.92,74.57 ; v1(105.92,75.44) 106.78,75.44 ; v1(147.92,49.78) 148.79,49.78 ; v1(147.92,49.78) 147.92,50.65 ; U15.1 14.6,13.43 ; U15.1 13.33,15.71 ; U15.1 12.06,13.43 ; v1(17.14,115.57) 18.01,115.57 ; v1(17.14,115.57) 17.14,114.71 ; v1(17.14,115.57) 16.28,115.57 ; v1(17.14,115.57) 17.14,116.43 ; v1(19.43,95.25) 19.43,96.11 ; v1(19.43,95.25) 20.29,95.25 ; v1(19.43,95.25) 18.57,95.25 ; v1(19.43,95.25) 19.43,94.39 ; v1(67.69,84.96) 67.06,84.33 67.06,84.45 v1(66.55,84.96) ; v1(67.69,84.96) 68.55,84.96 ; v1(67.69,84.96) 67.69,85.83 ; 131.51,104.35 U45.2 ; 66.05,114.99 DB15-1.17 71.51,114.99 ; U41.8 101.78,50.88 v1(97.6,55.05) ; 52.83,71.65 v1(52.83,72.52) ; v1(52.83,72.52) 52.83,73.38 ; v1(52.83,72.52) 53.7,72.52 ; v1(52.83,72.52) 51.97,72.52 ; U42.8 116.05,92.75 ; U42.8 115.24,91.48 ; U42.8 v1(116.05,89.27) ; v1(135.31,77.8) 135.31,78.66 ; v1(135.31,77.8) C120.2 133.07,77.8 ; v1(135.31,77.8) 136.17,77.8 ; U38.8 v1(116.18,75.03) ; U38.8 115.37,77.64 ; C144.1 116.67,47 ; C144.1 114.11,45.43 R142.2 113.22,45.24 ; v1(37.59,31.75) 37.59,32.61 ; v1(37.59,31.75) 36.73,31.75 ; v1(37.59,31.75) 38.46,31.75 ; v1(37.59,31.75) 37.59,30.89 ; 149.12,60.32 v1(149.99,60.32) ; v1(149.99,60.32) 149.99,61.19 ; v1(149.99,60.32) 149.99,59.46 ; 95.5,14.63 v1(95.5,15.49) ; v1(95.5,15.49) R124.1 ; v1(95.5,15.49) 94.64,15.49 ; v1(95.5,15.49) 95.5,16.36 ; 101.78,24.88 U35.8 ; U35.8 101.78,27.42 ; 109.86,96.49 v1(109.86,95.63) 109.86,94.77 ; v1(148.92,89.61) 148.92,91.04 ; v1(148.92,89.61) 148.92,88.19 ; v1(148.92,89.61) 147.3,89.61 ; 20.6,115.57 v1(21.46,115.57) ; v1(21.46,115.57) 21.46,116.43 ; v1(21.46,115.57) 22.33,115.57 ; v1(21.46,115.57) 21.46,114.71 ; U34.4 122.38,52.63 v1(122.3,52.7) 121.44,52.7 ; U34.4 123.39,51.1 ; U34.4 122.38,49.83 ; v1(13.72,117.6) 14.58,117.6 ; v1(13.72,117.6) 13.72,118.47 ; v1(13.72,117.6) 13.72,116.74 ; v1(13.72,117.6) 12.85,117.6 ; 147.09,88.9 v1(147.96,88.9) 147.96,88.04 ; 119.3,15.37 117.6,15.37 117.6,16.97 ; 139.47,23.62 v1(140.34,23.62) ; v1(140.34,23.62) 140.34,24.49 ; v1(140.34,23.62) 140.34,22.76 ; v1(140.34,23.62) 141.2,23.62 ; v1(29.08,11.94) 27.56,11.94 ; v1(29.08,11.94) 29.08,10.89 v1(29.83,10.14) 30.57,9.4 v1(31.62,9.4) ; 72.94,115.04 DB15-2.16 75.67,112.31 ; 138.71,106.3 v1(139.57,106.3) ; v1(139.57,106.3) 140.44,106.3 ; v1(139.57,106.3) 139.57,107.16 ; v1(139.57,106.3) 139.57,105.44 ; U41.6 104.32,52.27 100.2,56.39 98.93,56.39 v1(97.6,55.05) ; v1(66.55,84.96) 66.55,84.76 v1(67.06,84.25) ; v1(66.55,84.96) 65.68,84.96 ; v1(66.55,84.96) 66.55,85.83 ; 31.19,60.6 C19.2 ; 144.75,41.78 SOUND_OUT1.9 v1(147.92,41.78) ; 52.48,34.16 v1(53.34,34.16) ; v1(53.34,34.16) 53.34,35.03 ; v1(53.34,34.16) 53.34,33.3 ; v1(53.34,34.16) 54.2,34.16 ; v1(83.01,12.24) 83.88,12.24 ; v1(83.01,12.24) 82.15,12.24 ; v1(83.01,12.24) 83.01,13.1 ; v1(83.01,12.24) 83.01,11.37 ; 125.53,54.13 R143.2 124.79,53.14 v1(124.08,53.85) ; 142.44,21.13 v1(143.3,21.13) ; v1(143.3,21.13) 143.3,21.99 ; v1(143.3,21.13) 143.3,20.26 ; v1(143.3,21.13) 144.17,21.13 ; 71.06,84.18 v1(71.06,85.04) ; v1(71.06,85.04) 71.93,85.04 ; v1(71.06,85.04) PORT2.17 71.06,86.08 ; 140.46,27.2 v1(140.46,28.07) ; v1(140.46,28.07) 140.46,28.93 ; v1(140.46,28.07) 141.33,28.07 ; v1(140.46,28.07) 139.6,28.07 ; v1(148.13,74.61) MIC_IN1.13 144.75,74.61 ; v1(148.13,74.61) 149,74.61 ; v1(148.13,74.61) 148.13,73.75 ; v1(148.13,74.61) 148.13,75.48 ; v1(101.78,40.72) 101.78,41.58 ; v1(101.78,40.72) 102.21,41.15 v1(103.5,41.15) ; v1(101.78,40.72) 100.91,40.72 ; v1(101.78,40.72) 102.64,40.72 ; 55.14,40.77 v1(56.01,40.77) ; v1(56.01,40.77) 56.01,39.9 ; v1(56.01,40.77) 56.87,40.77 ; v1(56.01,40.77) 56.01,41.63 ; 145.57,102.87 v1(146.43,102.87) ; v1(146.43,102.87) 146.43,102.01 ; v1(146.43,102.87) 146.43,103.73 ; v1(146.43,102.87) 147.29,102.87 ; v1(15.24,115.57) 16.1,115.57 ; v1(15.24,115.57) 14.38,115.57 ; v1(15.24,115.57) 15.24,114.71 ; v1(15.24,115.57) 15.24,116.43 ; U7.11 48,56.52 48.64,55.88 v1(48.64,54.1) 48.64,53.24 ; U7.11 48.74,57.15 ; v1(50.23,109.28) 51.09,109.28 ; v1(50.23,109.28) 50.23,110.15 ; v1(50.23,109.28) 49.36,109.28 ; 91.16,111.01 DB15-2.4 91.16,113.47 ; 24,112.42 v1(24,113.28) ; v1(24,113.28) 24,114.15 ; v1(24,113.28) 23.14,113.28 ; v1(24,113.28) 24.87,113.28 ; v1(148.92,29.78) 150.55,29.78 ; v1(148.92,29.78) 148.92,31.21 ; v1(148.92,29.78) 148.92,28.36 ; C412.2 v1(132.79,15.95) ; C412.2 130.18,14.94 ; C412.2 130.18,16.97 ; v1(132.79,15.95) 132.79,16.81 ; v1(132.79,15.95) 133.65,15.95 ; v1(132.79,15.95) 132.79,15.09 ; v1(116.18,75.03) 117.04,75.03 ; v1(116.18,75.03) 116.18,74.17 ; v1(116.18,75.03) 115.32,75.03 ; 103.48,76.05 C103.1 102.46,77.04 ; 45.75,24.64 v1(46.61,24.64) ; v1(46.61,24.64) 46.61,25.5 ; v1(46.61,24.64) 47.47,24.64 ; POT1.3 73.76,37.08 ; POT1.3 75.01,35.84 ; POT1.3 73.76,34.59 ; 145.49,58.59 v1(146.35,58.59) ; v1(146.35,58.59) 147.21,58.59 ; v1(146.35,58.59) 146.35,59.46 ; v1(146.35,58.59) 146.35,57.73 ; v1(18.03,117.48) 18.03,118.34 ; v1(18.03,117.48) 18.9,117.48 ; v1(18.03,117.48) 17.17,117.48 ; v1(18.03,117.48) 18.03,116.61 ; 113.35,28.47 v1(114.21,28.47) ; v1(114.21,28.47) 115.07,28.47 ; v1(114.21,28.47) R138.2 113.32,26.26 ; 121.46,109.67 v1(121.46,110.54) ; v1(121.46,110.54) 121.46,111.4 ; v1(121.46,110.54) 120.59,110.54 ; v1(121.46,110.54) 122.32,110.54 ; C145.1 99.59,29.95 ; C145.1 100.58,30.96 ; 53.47,37.74 v1(53.47,38.61) ; v1(53.47,38.61) 53.47,39.47 ; v1(53.47,38.61) 54.33,38.61 ; v1(53.47,38.61) 52.6,38.61 ; 97.6,54.19 v1(97.6,55.05) ; v1(97.6,55.05) 96.74,55.05 ; v1(97.6,55.05) 97.6,55.92 ; C183.2 3.94,25.02 ; C183.2 3.94,22.99 ; 118.72,95.61 v1(119.58,95.61) ; v1(119.58,95.61) 119.58,94.74 ; v1(119.58,95.61) 119.58,96.47 ; 131.01,33.1 v1(131.88,33.1) U29.2 ; 148.08,51.33 v1(148.08,52.2) ; v1(148.08,52.2) 147.22,52.2 ; v1(119.63,52.7) 120.5,52.7 ; v1(119.63,52.7) 118.77,52.7 ; 42.41,56.05 U7.4 ; v1(142.11,102.87) 142.98,102.87 ; v1(142.11,102.87) 141.25,102.87 ; v1(142.11,102.87) 142.11,102.01 ; v1(142.11,102.87) 142.11,103.73 ; 144.75,35.78 SOUND_OUT1.15 v1(147.92,35.78) ; v1(20.95,108.2) 20.95,109.07 ; v1(20.95,108.2) 21.82,108.2 ; v1(20.95,108.2) 20.09,108.2 ; v1(20.95,108.2) 20.95,107.34 ; v1(108.2,76.71) 108.2,77.57 ; v1(108.2,76.71) 109.07,76.71 ; v1(108.2,76.71) 108.2,75.84 ; v1(108.2,76.71) 107.34,76.71 ; 80.29,41.3 v1(80.29,42.16) U25.3 80.29,44.65 ; U401.1 52.63,96.29 ; U401.1 53.73,94.81 ; U401.1 51.52,94.81 ; v1(42.41,59.3) 43.27,59.3 ; v1(42.41,59.3) 41.54,59.3 ; v1(42.41,59.3) 42.41,60.16 ; 150.6,66.04 v1(149.73,66.04) 149.73,65.18 ; v1(113.7,36.32) R140.2 112.81,35.13 ; v1(113.7,36.32) 114.57,36.32 ; v1(113.7,36.32) 112.84,36.32 ; 135.13,64.06 C127.2 v1(132.89,64.06) ; 88.29,22.86 v1(89.15,22.86) 89.15,22 ; U7.36 39.11,65.55 ; 47.99,24.59 v1(48.85,24.59) ; v1(48.85,24.59) 49.71,24.59 ; v1(48.85,24.59) 48.85,25.46 ; 36.68,29.51 v1(37.55,29.51) ; v1(37.55,29.51) 37.55,28.65 ; v1(37.55,29.51) 37.55,30.37 ; v1(37.55,29.51) 38.41,29.51 ; v1(41.02,79.5) 41.02,80.37 ; v1(41.02,79.5) 40.16,79.5 ; v1(41.02,79.5) 41.88,79.5 ; v1(103.5,41.15) 104.32,40.34 U37.6 ; v1(103.5,41.15) 104.37,41.15 ; v1(103.5,41.15) 103.5,42.01 ; v1(103.5,41.15) 103.5,40.28 ; 108.25,65.41 v1(109.12,65.41) ; v1(109.12,65.41) 109.12,66.27 ; v1(109.12,65.41) 109.98,65.41 ; 34.95,73.03 v1(35.81,73.03) 36.68,73.03 ; 148.08,54.2 v1(148.08,53.34) 147.22,53.34 ; DB1.11 111.26,116.99 ; DB1.11 108.53,114.26 ; DB1.11 105.8,116.99 ; J19.1 72.26,3.51 ; J19.1 74.14,1.63 ; J19.1 70.38,1.63 ; 50.46,20.53 51.88,20.53 ; v1(145.54,21.08) 146.41,21.08 ; v1(145.54,21.08) 144.68,21.08 ; v1(145.54,21.08) 145.54,20.22 ; v1(145.54,21.08) 145.54,21.95 ; v1(115.79,21.42) 116.65,21.42 ; v1(115.79,21.42) C136.1 116.78,22.54 ; v1(115.79,21.42) 114.92,21.42 ; v1(61.17,55.42) 62.03,55.42 ; v1(61.17,55.42) 61.17,56.28 ; v1(61.17,55.42) 60.3,55.42 ; v1(146.51,61.68) 146.51,62.54 ; v1(146.51,61.68) 147.38,61.68 ; v1(146.51,61.68) 146.51,60.81 ; v1(146.51,61.68) 145.65,61.68 ; v1(135.18,87.17) 136.04,87.17 ; v1(135.18,87.17) C121.2 132.94,87.17 ; v1(135.18,87.17) 135.18,88.04 ; v1(145.54,60.45) 145.54,61.32 ; v1(145.54,60.45) 145.54,59.59 ; v1(145.54,60.45) 144.68,60.45 ; v1(145.54,60.45) 146.41,60.45 ; 37.08,81.25 v1(37.08,80.39) 36.22,80.39 ; R124.1 96.9,16.38 ; R128.2 88.04,30.94 ; R128.2 88.04,28.96 ; v1(53.47,19.3) 53.47,20.17 ; v1(53.47,19.3) 53.47,18.44 ; v1(53.47,19.3) 52.6,19.3 ; v1(53.47,19.3) 54.33,19.3 ; v1(146.73,23.16) 146.73,24.02 ; v1(146.73,23.16) 146.73,22.3 ; v1(146.73,23.16) 145.87,23.16 ; v1(146.73,23.16) 147.59,23.16 ; 115.37,66.61 U36.8 ; U36.8 116.18,68.17 116.2,68.2 ; U36.8 116.18,65.34 ; 106.73,77.04 v1(105.87,77.04) 105.87,77.9 ; 48.33,35.45 48.33,36.63 ; 99.44,78.51 R91.1 99.44,80.49 ; v1(131.88,20.45) 132.74,20.45 ; v1(131.88,20.45) 131.88,19.58 ; v1(131.88,20.45) U27.2 ; v1(131.88,20.45) 131.01,20.45 ; 92.96,48.67 R136.2 93.85,49.66 ; v1(148.13,82.61) 148.13,83.48 ; v1(148.13,82.61) 149,82.61 ; v1(148.13,82.61) MIC_IN1.5 144.75,82.61 ; v1(148.13,82.61) 148.13,81.75 ; 54.41,56.23 v1(55.28,56.23) ; DB1.10 136.66,116.99 ; DB1.10 131.2,116.99 ; DB1.10 133.93,119.72 ; DB1.10 133.93,114.26 ; 115.19,89.27 v1(116.05,89.27) ; v1(116.05,89.27) 116.05,88.4 ; v1(11.68,117.6) 12.55,117.6 ; v1(11.68,117.6) 11.68,118.47 ; v1(11.68,117.6) 11.68,116.74 ; v1(11.68,117.6) 10.82,117.6 ; 147.92,34.92 v1(147.92,35.78) ; v1(147.92,35.78) 148.79,35.78 ; 54.44,58.23 v1(55.31,58.23) ; v1(20.07,117.48) 20.93,117.48 ; v1(20.07,117.48) 19.2,117.48 ; v1(20.07,117.48) 20.07,116.61 ; v1(20.07,117.48) 20.07,118.34 ; v1(24,117.6) 24.87,117.6 ; v1(24,117.6) 24,116.74 ; v1(24,117.6) 23.14,117.6 ; v1(24,117.6) 24,118.47 ; 147.22,29.08 v1(148.08,29.08) ; v1(148.08,29.08) 148.08,28.22 ; 58.17,38.23 C405.2 60.2,38.23 ; 37.97,72.54 v1(37.97,73.41) ; v1(37.97,73.41) 37.11,73.41 ; v1(37.97,73.41) 38.84,73.41 ; v1(110.62,98.55) 110.62,99.42 ; v1(110.62,98.55) 111.48,98.55 ; v1(110.62,98.55) 109.75,98.55 ; v1(110.62,98.55) 110.62,97.69 ; v1(148.08,67.18) 148.08,68.05 ; v1(148.08,67.18) 147.22,67.18 ; v1(67.69,83.44) 67.69,82.58 ; v1(67.69,83.44) 68.55,83.44 ; 132,82.3 v1(132.87,82.3) ; v1(132.87,82.3) 132.87,83.16 ; v1(132.87,82.3) C128.2 135.1,82.3 ; v1(132.89,64.06) 132.03,64.06 ; v1(132.89,64.06) 132.89,64.92 ; 92.3,87.83 C134.1 94.34,87.83 ; 58.67,113.54 58.5,113.36 58.5,112.22 ; 44.77,20.53 U51.2 ; R88.1 110.9,90.25 ; R88.1 111.89,91.14 ; v1(54.23,69.22) 55.09,69.22 ; v1(54.23,69.22) 54.23,70.08 ; v1(54.23,69.22) 53.37,69.22 ; v1(54.23,69.22) 54.23,68.35 ; 48.9,47.62 C20.2 48.9,49.66 ; 108.1,79.5 v1(108.97,79.5) ; v1(108.97,79.5) 108.97,80.37 ; v1(108.97,79.5) 108.97,78.64 ; v1(108.97,79.5) 109.83,79.5 ; v1(106.93,63.88) 107.8,63.88 ; v1(106.93,63.88) 106.93,63.02 ; v1(106.93,63.88) 106.07,63.88 ; v1(106.93,63.88) 106.93,64.74 ; 55.02,36.32 v1(55.88,36.32) ; v1(55.88,36.32) 55.88,37.19 ; v1(55.88,36.32) 55.88,35.46 ; v1(55.88,36.32) 56.74,36.32 ; 127.28,44.83 v1(128.5,44.83) 128.5,43.97 ; 71.48,29.21 v1(70.61,29.21) U24.4 70.61,32.26 ; v1(61.72,73.79) 61.72,74.65 ; v1(74.17,77.98) 75.03,77.98 ; v1(74.17,77.98) 73.3,77.98 ; v1(74.17,77.98) 74.17,78.84 ; 116.2,68.2 118.49,68.2 118.72,67.97 U36.6 118.72,65.34 ; 54.51,91.69 v1(55.37,91.69) ; v1(55.37,91.69) 55.37,92.56 ; v1(55.37,91.69) 56.24,91.69 ; v1(55.37,91.69) 55.37,90.83 ; R167.2 66.14,16.48 ; 118.8,33.38 v1(119.66,33.38) U30.2 ; v1(84.2,54.1) 83.34,54.1 ; v1(84.2,54.1) 84.2,54.97 ; v1(84.2,54.1) 85.06,54.1 ; C185.2 v1(77.67,54.05) ; C185.2 76.66,47.96 ; C185.2 78.69,47.96 ; v1(77.67,54.05) 76.81,54.05 ; v1(77.67,54.05) 78.54,54.05 ; v1(77.67,54.05) 77.67,54.91 ; v1(139.57,110.62) 139.57,111.48 ; v1(139.57,110.62) 139.57,109.75 ; v1(139.57,110.62) 138.71,110.62 ; v1(139.57,110.62) 140.44,110.62 ; 53.59,22.89 v1(53.59,23.75) ; v1(53.59,23.75) 53.59,24.61 ; v1(53.59,23.75) 54.46,23.75 ; v1(53.59,23.75) 52.73,23.75 ; 121.13,99.87 v1(122,99.87) R168.2 ; 100.58,79.65 v1(100.58,80.52) ; v1(100.58,80.52) 99.72,80.52 ; v1(100.58,80.52) 101.45,80.52 ; v1(41.78,62.99) 41.78,63.86 ; v1(41.78,62.99) 40.92,62.99 ; R168.2 122,96.67 ; C417.1 56.5,88.15 ; 14.88,117.48 v1(15.75,117.48) ; v1(15.75,117.48) 15.75,118.34 ; v1(15.75,117.48) 16.61,117.48 ; v1(15.75,117.48) 15.75,116.61 ; H4.1 31.67,15.6 ; 30.91,83.16 v1(31.78,83.16) 31.78,84.02 ; v1(37.97,74.68) 38.84,74.68 ; v1(37.97,74.68) 37.11,74.68 ; v1(37.97,74.68) 37.97,75.54 ; v1(89.38,34.57) 89.38,33.71 ; v1(89.38,34.57) 89.38,35.43 ; 27.43,103.71 C68.2 ; C68.2 27.43,107.11 ; C68.2 29.03,105.41 ; C68.2 25.83,105.41 ; v1(122.38,43.66) 123.24,43.66 ; v1(122.38,43.66) 122.86,43.18 R141.2 ; v1(122.38,43.66) 122.38,44.53 ; v1(122.38,43.66) U32.4 123.39,41.45 ; 34.95,71.75 v1(35.81,71.75) ; v1(35.81,71.75) 35.81,70.89 ; v1(35.81,71.75) 36.68,71.75 ; 60.45,74.65 v1(60.45,73.79) 59.59,73.79 ; v1(54.5,87.13) 54.5,88 ; v1(54.5,87.13) 54.5,86.27 ; v1(54.5,87.13) 53.63,87.13 ; 118.59,92.75 U42.6 v1(118.59,89.27) 119.46,89.27 ; 53.55,20.65 v1(53.55,21.51) ; v1(53.55,21.51) 54.41,21.51 ; v1(53.55,21.51) 52.68,21.51 ; v1(53.55,21.51) 53.55,22.37 ; v1(149.73,90.3) 150.6,90.3 ; v1(149.73,90.3) 149.73,91.16 ; 16.58,109.42 17.64,109.42 ; v1(147.92,41.78) v1(147.92,39.78) ; v1(147.92,41.78) 148.79,41.78 ; v1(147.92,39.78) 148.79,39.78 ; 149.73,31.22 v1(149.73,30.35) 150.6,30.35 ; 25.27,20.4 C411.2 ; C411.2 26.87,22.1 ; C411.2 23.67,22.1 ; 44.77,38.94 U48.2 ; 109.35,74.19 v1(109.35,75.06) ; v1(109.35,75.06) 108.48,75.06 ; v1(109.35,75.06) 109.35,75.92 ; U28.2 v1(119.66,21.39) ; PORT4.13 59.33,58.23 ; 34.95,109.08 C69.2 34.95,112.48 ; 50.59,38.94 51.88,38.94 ; U400.1 34.54,83.16 ; U31.2 v1(131.88,42.54) ; v1(148.13,78.61) 148.13,79.48 ; v1(148.13,78.61) 149,78.61 ; v1(148.13,78.61) 148.13,77.75 ; 87.15,77.98 v1(88.01,77.98) ; v1(88.01,77.98) 88.87,77.98 ; v1(88.01,77.98) 88.01,78.84 ; 63.6,11.89 R165.1 ; 119.35,78.99 v1(118.49,78.99) 118.72,78.77 U38.6 118.72,76.37 ; 57,68.23 PORT4.3 ; DB15-2.9 90.14,115.89 ; 55.88,22.99 R164.2 ; U47.2 63.12,13.84 ; 137.46,104.35 138.63,104.35 ; v1(149.61,67.18) 149.61,68.05
  TOP w0.381: U52.4 37.45,80.02 v1(37.08,80.39) ; DB15-2.4 90.81,112.6 90.81,113.28 90.14,113.94 DB15-2.9 91.16,115.67 DB15-2.14 ; U7.16 47.87,62.35 v1(47.24,61.72) ; 61.09,55.5 61.09,50.31 PORT4.19 ; 61.09,55.5 v1(61.17,55.42) PORT4.19 ; 61.09,55.5 60.36,56.23 PORT4.15 v1(55.28,56.23) ; v1(14.14,106.98) v1(14.14,109.42) 14.14,109.43 14.1,109.47 ; 26.8,62.61 28.7,62.61 29.69,61.62 C19.2 ; U402.3 25.27,25.53 C411.2 ; v1(61.85,72.77) 61.39,73.23 PORT4.20 ; v1(41.78,62.99) 41.14,62.35 39.27,62.35 ; PORT4.19 61.17,49.35 60.45,48.64 C20.2 ; U51.2 51.68,23.88 R164.2 ; U7.4 v1(42.41,59.3) ; 60.07,16.38 59.82,16.13 v1(59.82,14.35) 60.33,13.84 U47.2 ; 60.07,16.38 61.67,16.38 U47.4 ; 60.07,16.38 60.25,16.56 U47.4 ; v1(67.94,15.49) R167.2 66.17,15.52 66.17,16.26 65.86,16.56 U47.4 ; DB15-1.14 58.5,115.62 DB15-1.9 57.48,114.38 58.5,113.36 ; 39.27,62.35 U7.40 ; 39.27,62.35 39.65,62.73 39.65,63.57 39.27,63.95 U7.38 36.25,63.95 v1(35.31,64.9) 35.96,65.55 U7.36 ; C415.1 40.94,10.92 33.27,10.92 32.26,11.94 H4.1 ; PORT4.3 60.48,68.23 61.21,68.96 61.21,73.18 PORT4.20 ; C403.2 60.71,41.27 59.18,39.75 C405.2 ; C69.2 38.8,110.78 DB15-1.16 ; v1(60.45,73.79) 61.01,73.23 61.04,73.23 ; PORT4.20 61.04,73.23 ; PORT4.20 v1(61.72,73.79) ; R165.1 v1(64.49,10.26) ; 61.04,73.23 v1(60.45,72.64) ; C84.2 113.67,99.42 v1(115.09,97.99) 112.73,95.63 v1(109.86,95.63) ; R136.2 92.96,50.42 v1(97.6,55.05) ; U7.24 v1(47.2,67.52) ; 58.5,112.22 DB15-1.4 ; C22.2 v1(55.85,62.71) ; PORT4.13 v1(55.31,58.23)
  TOP w0.508: v1(89.15,22.86) 89.28,22.86 89.66,23.24 89.66,24 ; 108.33,95.63 v1(109.86,95.63) ; C417.1 v1(54.5,87.13) ; 52.63,94.44 v1(52.63,92.02) ; 52.63,94.44 U401.1 ; 52.63,94.44 v1(55.37,91.69) ; C418.1 v1(29.65,79.26) 29.55,79.16 C421.1 ; C21.2 v1(29.46,77.47) ; C134.1 93.32,87.6 v1(90.81,85.09) ; U400.1 v1(31.78,83.16) ; C103.1 v1(105.87,77.04) ; R91.1 99.57,79.5 v1(100.58,80.52)
  TOP w0.762: v1(113.92,15.37) v1(114.3,15.37) 117.6,15.37 v1(117.6,13.08) ; C68.2 32.8,110.78 C69.2
  TOP w1.778: v1(48.26,41.02) 48.33,40.95 U48.2 ; 53.21,38.99 51.48,38.99 51.44,38.94 ; 48.34,20.53 v1(50.55,22.73) 52.18,24.37 52.18,24.38 52.45,24.38 ; 48.34,20.53 50.46,20.53 v1(50.5,20.49) ; 48.34,20.53 U51.2 ; v1(48.19,36.63) 48.33,36.77 ; 48.33,36.77 48.33,36.63 ; 48.33,36.77 U48.2 ; 44.32,38.99 v1(46.1,38.99) 48.28,38.99 U48.2 ; 48.39,35.39 48.39,34.67 ; 48.39,35.39 48.33,35.45 ; 48.39,35.39 48.39,38.88 U48.2 ; U48.2 50.59,38.94 v1(50.63,38.91) ; 135,100.79 135.07,100.86 ; 135,100.79 135,99.31 ; 135,100.79 135,104.28 U45.2 ; U45.2 135.07,102.05 v1(135.06,102.04) ; U45.2 135.13,104.41 v1(135.13,106.43) ; U45.2 137.46,104.35 v1(137.5,104.31) 137.67,104.14 139.95,104.14 ; U45.2 135.07,106.37 v1(135.13,106.43) ; 16.19,109.42 v1(14.14,109.42) ; 16.19,109.42 16.58,109.42 19.81,112.65 ; 16.19,109.42 v1(16.26,109.35) ; v1(14.14,109.42) v1(11.87,109.42) 10.6,109.42 10.29,109.73 9.14,109.73 ; v1(14.14,109.42) 14.22,109.5 v1(14.22,111.51) 14.22,115.82 ; U51.2 48.33,17.04 ; U51.2 48.33,22.41 ; v1(135.13,106.43) 135.13,109.35 ; 52.7,20.7 51.73,20.7 51.56,20.53 ; 48.26,42.8 48.26,42.11 48.33,42.04 ; 48.33,22.41 48.33,24.02 48.39,24.08 48.39,24.77 ; 48.33,22.41 v1(48.13,22.61)
  TOP w2.032: U403.5 7.87,92.33 6.1,94.11 ; U402.3 29.08,28.7 25.27,24.89
  BOTTOM w0.305: 53.45,71.42 v1(54.31,71.42) ; v1(54.31,71.42) 54.31,70.56 ; v1(54.31,71.42) 54.31,72.28 ; v1(54.31,71.42) 55.17,71.42 ; v1(100.58,80.52) 101.45,80.52 ; v1(100.58,80.52) 100.58,79.65 ; v1(100.58,80.52) 100.58,81.38 ; v1(114.21,28.47) 115.07,28.47 ; v1(114.21,28.47) 114.21,29.34 ; v1(114.21,28.47) 113.35,28.47 ; v1(114.21,28.47) 114.21,27.61 ; v1(85.77,78.02) 86.63,78.02 ; v1(85.77,78.02) 85.77,77.16 ; v1(85.77,78.02) 85.77,78.89 ; v1(85.77,78.02) 84.91,78.02 ; 133.73,20.8 v1(134.59,20.8) ; v1(134.59,20.8) 134.59,19.94 ; v1(134.59,20.8) 134.59,21.67 ; v1(134.59,20.8) 135.46,20.8 ; v1(148.13,84.61) 149,84.61 ; v1(148.13,84.61) 147.27,84.61 ; v1(148.13,84.61) 148.13,85.48 ; v1(148.13,84.61) 148.13,83.75 ; 119.07,108.63 v1(119.93,108.63) ; v1(119.93,108.63) 119.93,109.49 ; v1(119.93,108.63) 120.8,108.63 ; v1(119.93,108.63) 119.93,107.77 ; 77.37,10.29 v1(78.23,10.29) ; v1(78.23,10.29) 79.1,10.29 ; v1(78.23,10.29) 78.23,11.15 ; v1(78.23,10.29) 78.23,9.42 ; v1(148.92,89.61) 149.61,90.3 v1(149.73,90.3) 149.73,91.16 ; v1(35.31,64.9) 36.17,64.9 ; v1(35.31,64.9) 34.44,64.9 ; v1(35.31,64.9) 35.31,64.03 ; v1(35.81,71.75) 36.68,71.75 ; v1(35.81,71.75) 35.81,70.89 ; v1(35.81,71.75) 34.95,71.75 ; 52.63,91.16 v1(52.63,92.02) ; v1(52.63,92.02) 51.77,92.02 ; v1(52.63,92.02) 53.49,92.02 ; v1(52.63,92.02) 52.63,92.89 ; 76.45,57.05 v1(76.45,57.91) ; v1(76.45,57.91) 77.32,57.91 ; v1(76.45,57.91) 76.45,58.78 ; v1(76.45,57.91) 75.59,57.91 ; 98.7,26.15 v1(99.57,26.15) ; v1(99.57,26.15) 99.57,25.29 ; v1(99.57,26.15) 99.57,27.01 ; v1(99.57,26.15) 100.43,26.15 ; 147.06,35.78 v1(147.92,35.78) ; v1(147.92,35.78) 147.92,36.65 ; v1(147.92,35.78) 148.79,35.78 ; v1(147.92,35.78) 147.92,34.92 ; 84.25,36.78 v1(85.12,36.78) ; v1(85.12,36.78) 85.98,36.78 ; v1(85.12,36.78) 85.12,37.64 ; v1(85.12,36.78) 85.12,35.92 ; 149.61,68.05 v1(149.61,67.18) v1(148.08,67.18) ; 80.77,10.44 v1(80.77,11.3) ; v1(80.77,11.3) 79.91,11.3 ; v1(80.77,11.3) 81.64,11.3 ; 37.97,72.54 v1(37.97,73.41) ; v1(37.97,73.41) 38.84,73.41 ; v1(37.97,73.41) 37.11,73.41 ; 118.8,33.38 v1(119.66,33.38) ; v1(119.66,33.38) 120.52,33.38 ; v1(119.66,33.38) 119.66,32.51 ; v1(119.66,33.38) 119.66,34.24 ; 147.92,44.92 v1(147.92,45.78) ; v1(147.92,45.78) 147.92,46.65 ; v1(147.92,45.78) 147.06,45.78 ; v1(147.92,45.78) 148.79,45.78 ; 148.08,51.33 v1(148.08,52.2) ; v1(148.08,52.2) 147.22,52.2 ; v1(148.08,52.2) v1(148.08,53.34) ; v1(103.48,72.62) 104.34,72.62 ; v1(103.48,72.62) 103.48,73.48 ; v1(103.48,72.62) 103.48,71.75 ; v1(103.48,72.62) 102.62,72.62 ; 109.12,66.27 v1(109.12,65.41) 108.25,65.41 ; 135.18,86.31 v1(135.18,87.17) ; v1(135.18,87.17) 135.18,88.04 ; v1(135.18,87.17) 134.32,87.17 ; v1(135.18,87.17) 136.04,87.17 ; 69.72,77.24 v1(69.72,78.11) ; v1(69.72,78.11) 69.72,78.97 ; v1(69.72,78.11) 70.59,78.11 ; v1(69.72,78.11) 68.86,78.11 ; 113.7,35.46 v1(113.7,36.32) ; v1(113.7,36.32) 114.57,36.32 ; v1(113.7,36.32) 113.7,37.19 ; v1(37.08,80.39) 37.95,80.39 ; v1(37.08,80.39) 36.22,80.39 ; v1(37.08,80.39) 37.08,79.53 ; v1(37.08,80.39) 37.08,81.25 ; 78.69,57 v1(78.69,57.87) ; v1(78.69,57.87) 79.56,57.87 ; v1(78.69,57.87) 78.69,58.73 ; v1(78.69,57.87) 77.83,57.87 ; 120.5,52.7 v1(119.63,52.7) 119.63,51.84 ; v1(42.41,59.3) 43.27,59.3 ; v1(42.41,59.3) 42.41,58.43 ; v1(42.41,59.3) 42.41,60.16 ; v1(42.41,59.3) 41.54,59.3 ; 116.18,77.85 v1(116.18,78.71) ; v1(116.18,78.71) 116.18,79.58 ; v1(116.18,78.71) 115.32,78.71 ; v1(116.18,78.71) 117.04,78.71 ; 71.06,84.18 v1(71.06,85.04) ; v1(71.06,85.04) 71.93,85.04 ; v1(71.06,85.04) 71.06,85.9 ; 73.76,34.59 POT1.3 ; POT1.3 73.76,37.08 ; POT1.3 72.52,35.84 ; POT1.3 75.01,35.84 ; v1(89.15,22.86) 90.02,22.86 ; v1(89.15,22.86) 88.29,22.86 ; v1(89.15,22.86) 89.15,23.72 ; v1(128.5,44.83) 129.36,44.83 ; v1(128.5,44.83) 127.63,44.83 ; v1(128.5,44.83) 128.5,45.69 ; v1(128.5,44.83) 128.5,43.97 ; 146.73,22.3 v1(146.73,23.16) ; v1(146.73,23.16) 146.73,24.02 ; v1(146.73,23.16) 147.59,23.16 ; v1(146.73,23.16) 145.87,23.16 ; v1(137.41,16.26) 137.41,17.12 ; v1(137.41,16.26) 136.55,16.26 ; v1(137.41,16.26) 138.28,16.26 ; v1(137.41,16.26) 137.41,15.39 ; 105.92,74.57 v1(105.92,75.44) ; v1(105.92,75.44) 106.78,75.44 ; v1(105.92,75.44) 105.05,75.44 ; DB1.10 136.66,116.99 ; DB1.10 133.93,119.72 ; DB1.10 133.93,114.26 ; DB1.10 131.2,116.99 ; 131.01,33.1 v1(131.88,33.1) ; v1(131.88,33.1) 131.88,32.23 ; v1(131.88,33.1) 132.74,33.1 ; v1(131.88,33.1) 131.88,33.96 ; v1(140.84,57.02) 140.84,57.89 ; v1(140.84,57.02) 139.98,57.02 ; v1(140.84,57.02) 141.71,57.02 ; v1(140.84,57.02) 140.84,56.16 ; 34.7,46.99 v1(35.56,46.99) 35.56,47.85 ; 80.29,41.3 v1(80.29,42.16) 81.15,42.16 ; v1(115.09,97.99) 115.09,98.86 ; v1(115.09,97.99) 115.09,97.13 ; v1(115.09,97.99) 114.22,97.99 ; v1(115.09,97.99) 115.95,97.99 ; v1(148.13,78.61) 149,78.61 ; v1(148.13,78.61) 147.27,78.61 ; v1(148.13,78.61) 148.13,77.75 ; v1(148.13,78.61) 148.13,79.48 ; v1(70.06,85.04) 70.06,85.9 ; v1(70.06,85.04) 69.2,85.04 ; v1(70.06,85.04) 70.06,84.18 ; 30.91,83.16 v1(31.78,83.16) ; v1(31.78,83.16) 31.78,84.02 ; v1(31.78,83.16) 32.64,83.16 ; v1(31.78,83.16) 31.78,82.3 ; 42.39,97.03 H3.1 ; H3.1 42.39,104.34 ; H3.1 46.05,100.69 ; H3.1 38.73,100.69 ; v1(148.08,90.3) 148.77,89.61 148.67,89.61 v1(147.96,88.9) ; v1(148.08,90.3) 148.08,91.16 ; v1(148.08,90.3) 147.22,90.3 ; 47.24,60.86 v1(47.24,61.72) 47.24,62.59 ; v1(115.79,21.42) 116.65,21.42 ; v1(115.79,21.42) 115.79,20.56 ; v1(115.79,21.42) 114.92,21.42 ; v1(115.79,21.42) 115.79,22.29 ; v1(109.86,81.41) 110.72,81.41 ; v1(109.86,81.41) 108.99,81.41 ; v1(109.86,81.41) 109.86,80.54 ; v1(109.86,81.41) 109.86,82.27 ; v1(35.18,59.94) 36.04,59.94 ; v1(35.18,59.94) 35.18,60.81 ; v1(35.18,59.94) 34.32,59.94 ; v1(131.88,42.54) 132.74,42.54 ; v1(131.88,42.54) 131.01,42.54 ; v1(131.88,42.54) 131.88,41.68 ; v1(131.88,42.54) 131.88,43.41 ; v1(147.92,43.78) 147.92,44.65 ; v1(147.92,43.78) 148.79,43.78 ; v1(147.92,43.78) 147.92,42.92 ; v1(147.92,43.78) 147.06,43.78 ; 109.75,98.55 v1(110.62,98.55) ; v1(110.62,98.55) 111.48,98.55 ; v1(110.62,98.55) 110.62,97.69 ; v1(110.62,98.55) 110.62,99.42 ; v1(122.43,80.01) 122.43,80.87 ; v1(122.43,80.01) 121.56,80.01 ; v1(122.43,80.01) 123.29,80.01 ; v1(122.43,80.01) 122.43,79.15 ; 147.27,80.61 v1(148.13,80.61) ; v1(148.13,80.61) 149,80.61 ; v1(148.13,80.61) 148.13,79.75 ; v1(148.13,80.61) 148.13,81.48 ; 147.22,53.34 v1(148.08,53.34) ; v1(148.08,53.34) 148.08,54.2 ; 83.57,77.24 v1(83.57,78.11) ; v1(83.57,78.11) 84.43,78.11 ; v1(83.57,78.11) 83.57,78.97 ; v1(83.57,78.11) 82.7,78.11 ; v1(145.29,56.9) 145.29,57.76 ; v1(145.29,56.9) 146.15,56.9 ; v1(145.29,56.9) 144.42,56.9 ; v1(145.29,56.9) 145.29,56.03 ; v1(54.36,73.66) 54.36,74.52 ; v1(54.36,73.66) 55.22,73.66 ; v1(54.36,73.66) 53.49,73.66 ; v1(54.36,73.66) 54.36,72.8 ; 40.16,78.23 v1(41.02,78.23) 41.02,77.37 ; 91.16,113.47 DB15-2.4 91.16,111.01 ; 65.68,84.96 v1(66.55,84.96) 66.55,85.83 ; 134.37,59.41 v1(135.23,59.41) ; v1(135.23,59.41) 136.09,59.41 ; v1(135.23,59.41) 135.23,60.27 ; v1(135.23,59.41) 135.23,58.55 ; v1(132.89,73.08) 133.76,73.08 ; v1(132.89,73.08) 132.89,73.94 ; v1(132.89,73.08) 132.89,72.21 ; v1(132.89,73.08) 132.03,73.08 ; H6.2 105.51,14.99 ; H6.2 106.76,13.74 ; H6.2 104.27,13.74 ; H6.2 105.51,12.5 ; DB15-1.16 43,117.72 ; DB15-1.16 40.27,114.99 ; DB15-1.16 43,112.26 ; DB15-1.16 45.73,114.99 ; H5.2 65.89,22.99 ; H5.2 64.64,21.74 ; H5.2 63.4,22.99 ; H5.2 64.64,24.23 ; 134.95,41.33 v1(135.81,41.33) ; v1(135.81,41.33) 135.81,42.19 ; v1(135.81,41.33) 136.68,41.33 ; v1(135.81,41.33) 135.81,40.46 ; 77.98,36.32 v1(78.84,36.32) ; v1(78.84,36.32) 78.84,37.19 ; v1(78.84,36.32) 79.71,36.32 ; v1(78.84,36.32) 78.84,35.46 ; v1(77.67,54.05) 77.67,54.91 ; v1(77.67,54.05) 78.54,54.05 ; v1(77.67,54.05) 77.67,53.19 ; v1(77.67,54.05) 76.81,54.05 ; v1(143.08,56.98) 143.95,56.98 ; v1(143.08,56.98) 142.22,56.98 ; v1(143.08,56.98) 143.08,56.11 ; v1(143.08,56.98) 143.08,57.84 ; 118.8,21.39 v1(119.66,21.39) ; v1(119.66,21.39) 120.52,21.39 ; v1(119.66,21.39) 119.66,20.52 ; v1(119.66,21.39) 119.66,22.25 ; 71.93,77.16 v1(71.93,78.02) ; v1(71.93,78.02) 71.93,78.89 ; v1(71.93,78.02) 72.79,78.02 ; v1(71.93,78.02) 71.06,78.02 ; v1(109.35,75.06) 110.21,75.06 ; v1(109.35,75.06) 108.48,75.06 ; v1(109.35,75.06) 109.35,75.92 ; v1(109.35,75.06) 109.35,74.19 ; v1(132.89,64.06) 132.89,64.92 ; v1(132.89,64.06) 132.89,63.2 ; v1(132.89,64.06) 133.76,64.06 ; v1(132.89,64.06) 132.03,64.06 ; v1(132.87,82.3) 133.73,82.3 ; v1(132.87,82.3) 132.87,81.43 ; v1(132.87,82.3) 132,82.3 ; v1(132.87,82.3) 132.87,83.16 ; v1(80.64,40.26) 81.51,40.26 ; v1(80.64,40.26) 80.64,39.4 ; v1(80.64,40.26) 79.78,40.26 ; v1(80.64,40.26) 80.64,41.12 ; 52.96,76.1 v1(52.96,76.96) ; v1(52.96,76.96) 52.1,76.96 ; v1(52.96,76.96) 53.82,76.96 ; v1(52.96,76.96) 52.96,77.83 ; 114.3,14.5 v1(114.3,15.37) ; v1(114.3,15.37) 115.16,15.37 ; v1(114.3,15.37) 114.3,16.23 ; v1(89.26,29.95) 89.26,30.81 ; v1(89.26,29.95) 89.26,29.08 ; v1(89.26,29.95) 90.12,29.95 ; v1(89.26,29.95) 88.39,29.95 ; 55.31,57.37 v1(55.31,58.23) ; v1(55.31,58.23) 54.44,58.23 ; v1(55.31,58.23) 56.17,58.23 ; v1(55.31,58.23) 55.31,59.1 ; 119.46,89.27 v1(118.59,89.27) 118.59,90.13 ; v1(132.79,15.95) 133.65,15.95 ; v1(132.79,15.95) 132.79,16.81 ; v1(132.79,15.95) 131.93,15.95 ; v1(132.79,15.95) 132.79,15.09 ; v1(148.97,23.11) 148.97,23.98 ; v1(148.97,23.11) 148.97,22.25 ; v1(148.97,23.11) 149.83,23.11 ; v1(148.97,23.11) 148.11,23.11 ; v1(148.13,82.61) 149,82.61 ; v1(148.13,82.61) 148.13,83.48 ; v1(148.13,82.61) 147.27,82.61 ; v1(148.13,82.61) 148.13,81.75 ; v1(116.05,89.27) 116.05,90.13 ; v1(116.05,89.27) 116.05,88.4 ; v1(116.05,89.27) 115.19,89.27 ; v1(116.05,89.27) 116.92,89.27 ; 137.5,17.6 v1(137.5,18.46) ; v1(137.5,18.46) 138.36,18.46 ; v1(137.5,18.46) 136.63,18.46 ; v1(137.5,18.46) 137.5,19.32 ; 134.59,51.49 v1(134.59,52.35) ; v1(134.59,52.35) 135.46,52.35 ; v1(134.59,52.35) 133.73,52.35 ; v1(134.59,52.35) 134.59,53.21 ; v1(29.46,77.47) 30.33,77.47 ; v1(29.46,77.47) 28.6,77.47 ; v1(29.46,77.47) 29.46,78.33 ; v1(29.46,77.47) 29.46,76.61 ; v1(147.92,49.78) 147.92,50.65 ; v1(147.92,49.78) 147.06,49.78 ; v1(147.92,49.78) 147.92,48.92 ; v1(147.92,49.78) 148.79,49.78 ; v1(106.93,63.88) 107.8,63.88 ; v1(106.93,63.88) 106.93,63.02 ; v1(106.93,63.88) 106.07,63.88 ; v1(106.93,63.88) 106.93,64.74 ; 66.05,114.99 DB15-1.17 ; DB15-1.17 68.78,112.26 ; DB15-1.17 68.78,117.72 ; DB15-1.17 71.51,114.99 ; J19.1 72.26,3.51 ; J19.1 74.14,1.63 ; J19.1 70.38,1.63 ; v1(148.72,61.59) 148.72,62.46 ; v1(148.72,61.59) 149.58,61.59 ; v1(148.72,61.59) 147.85,61.59 ; v1(148.72,61.59) 148.72,60.73 ; 117.63,78.99 v1(118.49,78.99) ; v1(118.49,78.99) 118.49,78.13 ; v1(118.49,78.99) 118.49,79.86 ; 67.69,82.58 v1(67.69,83.44) 68.55,83.44 ; 142.44,21.13 v1(143.3,21.13) ; v1(143.3,21.13) 144.04,20.39 144.04,18.21 144.3,18.21 144.7,17.81 144.7,17.24 144.04,16.58 H2.1 ; v1(143.3,21.13) 143.3,21.99 ; v1(143.3,21.13) 143.3,20.26 ; v1(143.3,21.13) 144.17,21.13 ; v1(61.17,55.42) 61.17,56.28 ; v1(61.17,55.42) 62.03,55.42 ; v1(61.17,55.42) 60.3,55.42 ; v1(61.17,55.42) 61.17,54.56 ; v1(148.08,30.35) 148.08,31.22 ; v1(148.08,30.35) 147.22,30.35 ; v1(148.08,30.35) 148.21,30.35 148.84,29.72 149.22,29.72 v1(149.73,29.21) 149.73,28.35 ; v1(147.92,39.78) 148.79,39.78 ; v1(147.92,39.78) 147.92,40.65 ; v1(147.92,39.78) 147.06,39.78 ; v1(147.92,39.78) 147.92,38.92 ; 89.94,28.07 v1(90.81,28.07) ; v1(90.81,28.07) 90.81,27.2 ; v1(90.81,28.07) 91.67,28.07 ; v1(90.81,28.07) 90.81,28.93 ; 148.08,65.18 v1(148.08,66.04) 147.22,66.04 ; J20.1 89.99,3.51 ; J20.1 91.87,1.63 ; J20.1 88.11,1.63 ; v1(107.19,80.26) 107.19,81.13 ; v1(107.19,80.26) 107.19,79.4 ; v1(107.19,80.26) 108.05,80.26 ; v1(107.19,80.26) 106.32,80.26 ; DB1.11 111.26,116.99 ; DB1.11 108.53,114.26 ; DB1.11 105.8,116.99 ; 55.85,61.85 v1(55.85,62.71) ; v1(55.85,62.71) 54.99,62.71 ; v1(55.85,62.71) 55.85,63.58 ; v1(55.85,62.71) 56.72,62.71 ; v1(148.59,58.55) 148.59,59.41 ; v1(148.59,58.55) 149.45,58.55 ; v1(148.59,58.55) 147.73,58.55 ; v1(148.59,58.55) 148.59,57.68 ; 72.47,29.26 v1(73.33,29.26) ; v1(73.33,29.26) 74.19,29.26 ; v1(73.33,29.26) 73.33,30.12 ; v1(73.33,29.26) 73.33,28.4 ; v1(47.2,67.52) 48.07,67.52 ; v1(47.2,67.52) 47.2,66.66 ; v1(47.2,67.52) 47.2,68.39 ; v1(74.17,77.98) 75.03,77.98 ; v1(74.17,77.98) 74.17,78.84 ; v1(74.17,77.98) 74.17,77.11 ; v1(74.17,77.98) 73.3,77.98 ; 147.92,36.92 v1(147.92,37.78) ; v1(147.92,37.78) 147.92,38.65 ; v1(147.92,37.78) 148.79,37.78 ; v1(147.92,37.78) 147.06,37.78 ; 121.51,43.66 v1(122.38,43.66) ; v1(122.38,43.66) 122.38,44.53 ; v1(122.38,43.66) 123.24,43.66 ; v1(122.38,43.66) 122.38,42.8 ; v1(52.91,74.72) 53.78,74.72 ; v1(52.91,74.72) 52.91,75.59 ; v1(52.91,74.72) 52.05,74.72 ; v1(52.91,74.72) 52.91,73.86 ; 149.61,88.16 v1(149.61,89.03) ; 149.73,65.18 v1(149.73,66.04) 149.18,66.6 v1(148.92,66.6) 148.92,65.73 ; v1(107.57,74.8) 107.57,75.67 ; v1(107.57,74.8) 108.43,74.8 ; v1(107.57,74.8) 107.57,73.94 ; v1(107.57,74.8) 106.71,74.8 ; v1(95.5,15.49) 96.37,15.49 ; 91.67,85.09 v1(90.81,85.09) 90.81,85.95 ; v1(55.28,56.23) 56.14,56.23 ; v1(55.28,56.23) 55.28,57.09 ; v1(55.28,56.23) 54.41,56.23 ; v1(55.28,56.23) 55.28,55.37 ; 122.17,107.72 v1(122.17,108.59) ; v1(122.17,108.59) 121.31,108.59 ; v1(122.17,108.59) 122.17,109.45 ; v1(122.17,108.59) 123.04,108.59 ; 54.23,68.35 v1(54.23,69.22) ; v1(54.23,69.22) 55.09,69.22 ; v1(54.23,69.22) 53.37,69.22 ; v1(54.23,69.22) 54.23,70.08 ; v1(122,99.87) 122.86,99.87 ; v1(122,99.87) 122,99.01 ; v1(122,99.87) 122,100.74 ; v1(122,99.87) 121.13,99.87 ; v1(119.66,43.66) 120.52,43.66 ; v1(119.66,43.66) 118.8,43.66 ; v1(119.66,43.66) 119.66,44.53 ; v1(119.66,43.66) 119.66,42.8 ; 47.78,54.1 v1(48.64,54.1) ; v1(48.64,54.1) 49.5,54.1 ; v1(48.64,54.1) 48.64,53.24 ; v1(48.64,54.1) 48.64,54.97 ; 18.57,95.25 v1(19.43,95.25) ; v1(19.43,95.25) 20.29,95.25 ; v1(19.43,95.25) 19.43,96.11 ; v1(19.43,95.25) 19.43,94.39 ; 114.02,52.32 v1(113.16,52.32) 113.16,51.46 ; 89.41,85.83 v1(89.41,84.96) 88.54,84.96 ; 103.45,23.94 v1(104.32,23.94) ; v1(104.32,23.94) 104.32,23.08 ; v1(104.32,23.94) 104.32,24.8 ; v1(104.32,23.94) 105.18,23.94 ; 83.01,11.37 v1(83.01,12.24) ; v1(109.6,86.23) 109.6,87.1 ; v1(109.6,86.23) 110.46,86.23 ; v1(109.6,86.23) 109.6,85.37 ; v1(109.6,86.23) 108.74,86.23 ; 36.22,94.36 J21.1 ; J21.1 38.71,94.36 ; J21.1 37.47,93.12 ; v1(96.14,58.67) 97,58.67 ; v1(96.14,58.67) 95.28,58.67 ; v1(96.14,58.67) 96.14,57.81 ; v1(96.14,58.67) 96.14,59.54 ; 133.73,121.56 v1(133.73,122.43) ; v1(133.73,122.43) 133.73,123.29 ; v1(133.73,122.43) 134.59,122.43 ; v1(133.73,122.43) 132.87,122.43 ; v1(108.97,79.5) 108.97,80.37 ; v1(108.97,79.5) 108.1,79.5 ; v1(108.97,79.5) 108.97,78.64 ; v1(108.97,79.5) 109.83,79.5 ; 90.55,82.58 v1(90.55,83.44) 91.41,83.44 ; v1(144.53,23.24) 144.53,24.1 ; v1(144.53,23.24) 145.39,23.24 ; v1(144.53,23.24) 144.53,22.38 ; v1(144.53,23.24) 143.66,23.24 ; v1(148.13,72.61) 148.13,73.48 ; v1(148.13,72.61) 147.27,72.61 ; v1(148.13,72.61) 148.13,71.75 ; v1(148.13,72.61) 149,72.61 ; v1(82.93,10.03) 83.79,10.03 ; v1(82.93,10.03) 82.93,10.9 ; v1(82.93,10.03) 82.07,10.03 ; v1(82.93,10.03) 82.93,9.17 ; 147.96,88.04 v1(147.96,88.9) ; v1(147.96,88.9) 147.09,88.9 ; 66.29,82.58 v1(66.29,83.44) 65.43,83.44 ; v1(135.33,68.71) 136.19,68.71 ; v1(135.33,68.71) 135.33,69.57 ; v1(135.33,68.71) 135.33,67.84 ; v1(135.33,68.71) 134.47,68.71 ; v1(131.7,52.2) 132.56,52.2 ; v1(131.7,52.2) 130.84,52.2 ; v1(131.7,52.2) 131.7,51.33 ; v1(131.7,52.2) 131.7,53.06 ; 72.94,115.04 DB15-2.16 ; DB15-2.16 75.67,112.31 ; DB15-2.16 78.4,115.04 ; DB15-2.16 75.67,117.77 ; 41.78,63.86 v1(41.78,62.99) 41.78,62.13 ; 113.06,15.37 v1(113.92,15.37) ; v1(113.92,15.37) 113.92,14.5 ; v1(113.92,15.37) 113.92,16.23 ; v1(89.38,34.57) 90.25,34.57 ; v1(89.38,34.57) 89.38,33.71 ; v1(89.38,34.57) 89.38,35.43 ; v1(89.38,34.57) 88.52,34.57 ; v1(140.46,28.07) 140.46,28.93 ; v1(140.46,28.07) 141.33,28.07 ; v1(140.46,28.07) 140.46,27.2 ; v1(140.46,28.07) 139.6,28.07 ; v1(123.7,110.49) 124.56,110.49 ; v1(123.7,110.49) 122.83,110.49 ; v1(123.7,110.49) 123.7,111.35 ; v1(123.7,110.49) 123.7,109.63 ; 148.92,30.65 v1(148.92,29.78) 149.16,29.78 v1(149.73,30.35) 149.73,31.22 ; 50.23,108.42 v1(50.23,109.28) ; v1(50.23,109.28) 51.09,109.28 ; v1(50.23,109.28) 50.23,110.15 ; v1(50.23,109.28) 49.36,109.28 ; v1(141.1,21.21) 141.96,21.21 ; v1(141.1,21.21) 141.1,20.35 ; v1(141.1,21.21) 141.1,22.07 ; v1(141.1,21.21) 140.23,21.21 ; 147.27,86.61 v1(148.13,86.61) ; v1(148.13,86.61) 148.13,85.75 ; v1(148.13,86.61) 148.13,87.48 ; v1(148.13,86.61) 149,86.61 ; 147.92,46.92 v1(147.92,47.78) ; v1(147.92,47.78) 148.79,47.78 ; v1(147.92,47.78) 147.92,48.65 ; v1(147.92,47.78) 147.06,47.78 ; v1(135.18,91.95) 135.18,92.81 ; v1(135.18,91.95) 136.04,91.95 ; v1(135.18,91.95) 135.18,91.08 ; v1(135.18,91.95) 134.32,91.95 ; DB15-2.14 91.16,118.43 ; 146.51,60.81 v1(146.51,61.68) ; v1(146.51,61.68) 147.38,61.68 ; v1(146.51,61.68) 145.65,61.68 ; v1(146.51,61.68) 146.51,62.54 ; v1(116.18,75.03) 117.04,75.03 ; v1(116.18,75.03) 116.18,74.17 ; v1(116.18,75.03) 116.18,75.9 ; v1(116.18,75.03) 115.32,75.03 ; 117.6,12.22 v1(117.6,13.08) ; v1(117.6,13.08) 118.47,13.08 ; v1(117.6,13.08) 117.6,13.94 ; v1(117.6,13.08) 116.74,13.08 ; v1(145.54,21.08) 146.41,21.08 ; v1(145.54,21.08) 145.54,21.95 ; v1(145.54,21.08) 144.68,21.08 ; v1(145.54,21.08) 145.54,20.22 ; v1(122.38,21.39) 122.38,22.25 ; v1(122.38,21.39) 122.38,20.52 ; v1(122.38,21.39) 123.24,21.39 ; v1(122.38,21.39) 121.51,21.39 ; 30,50.67 UART_2.1 ; UART_2.1 32.49,50.67 ; UART_2.1 31.24,49.43 ; v1(121.46,110.54) 122.32,110.54 ; v1(121.46,110.54) 121.46,109.67 ; v1(121.46,110.54) 120.59,110.54 ; v1(121.46,110.54) 121.46,111.4 ; v1(114.1,90.25) 114.96,90.25 ; v1(114.1,90.25) 114.1,89.38 ; v1(114.1,90.25) 113.23,90.25 ; v1(114.1,90.25) 114.1,91.11 ; 83.34,54.1 v1(84.2,54.1) ; v1(84.2,54.1) 84.2,53.24 ; v1(84.2,54.1) 85.06,54.1 ; v1(84.2,54.1) 84.2,54.97 ; 54.51,91.69 v1(55.37,91.69) ; v1(55.37,91.69) 56.24,91.69 ; v1(55.37,91.69) 55.37,90.83 ; v1(55.37,91.69) 55.37,92.56 ; H2.1 147.7,15.02 ; H2.1 140.39,15.02 ; 147.22,29.08 v1(148.08,29.08) 148.08,28.22 ; v1(77.03,29.78) 77.03,30.65 ; v1(77.03,29.78) 77.89,29.78 ; v1(77.03,29.78) 77.03,28.92 ; v1(109.86,95.63) 110.72,95.63 ; v1(109.86,95.63) 108.99,95.63 ; v1(109.86,95.63) 109.86,96.49 ; v1(109.86,95.63) 109.86,94.77 ; 131.01,20.45 v1(131.88,20.45) ; v1(131.88,20.45) 131.88,19.58 ; v1(131.88,20.45) 131.88,21.31 ; v1(131.88,20.45) 132.74,20.45 ; 146.92,60.41 v1(147.78,60.41) ; v1(147.78,60.41) 148.65,60.41 ; v1(147.78,60.41) 147.78,59.54 ; v1(147.78,60.41) 147.78,61.27 ; v1(122.3,52.7) 122.3,53.57 ; v1(122.3,52.7) 123.16,52.7 ; v1(122.3,52.7) 121.44,52.7 ; v1(122.3,52.7) 122.3,51.84 ; v1(100.58,27.74) 100.58,28.6 ; v1(100.58,27.74) 99.72,27.74 ; v1(100.58,27.74) 100.58,26.87 ; v1(100.58,27.74) 101.45,27.74 ; 149.73,51.33 v1(149.73,52.2) 149.15,52.78 v1(148.92,52.78) 148.92,51.92 ; v1(59.82,14.35) 60.68,14.35 ; v1(59.82,14.35) 59.82,13.49 ; v1(59.82,14.35) 59.82,15.21 ; v1(59.82,14.35) 58.95,14.35 ; v1(148.13,76.61) 149,76.61 ; v1(148.13,76.61) 148.13,75.75 ; v1(148.13,76.61) 148.13,77.48 ; v1(148.13,76.61) 147.27,76.61 ; 87.15,77.98 v1(88.01,77.98) ; v1(88.01,77.98) 88.01,77.11 ; v1(88.01,77.98) 88.01,78.84 ; v1(88.01,77.98) 88.87,77.98 ; v1(140.34,23.62) 140.34,24.49 ; v1(140.34,23.62) 141.2,23.62 ; v1(140.34,23.62) 140.34,22.76 ; v1(140.34,23.62) 139.47,23.62 ; v1(52.83,72.52) 52.83,73.38 ; v1(52.83,72.52) 52.83,71.65 ; v1(52.83,72.52) 53.7,72.52 ; v1(52.83,72.52) 51.97,72.52 ; 101.45,112.31 DB15-2.17 ; DB15-2.17 98.72,115.04 ; DB15-2.17 104.18,115.04 ; DB15-2.17 101.45,117.77 ; 144.68,60.45 v1(145.54,60.45) ; v1(145.54,60.45) 146.41,60.45 ; v1(145.54,60.45) 145.54,61.32 ; v1(145.54,60.45) 145.54,59.59 ; v1(29.65,79.26) 29.65,80.12 ; v1(29.65,79.26) 30.51,79.26 ; v1(29.65,79.26) 28.78,79.26 ; v1(29.65,79.26) 29.65,78.4 ; v1(117.73,108.71) 117.73,109.58 ; v1(117.73,108.71) 118.59,108.71 ; v1(117.73,108.71) 116.87,108.71 ; v1(117.73,108.71) 117.73,107.85 ; 101.64,65.47 v1(102.5,65.47) ; v1(102.5,65.47) 103.37,65.47 ; v1(102.5,65.47) 102.5,66.33 ; v1(102.5,65.47) 102.5,64.6 ; 37.59,30.89 v1(37.59,31.75) ; v1(37.59,31.75) 36.73,31.75 ; v1(37.59,31.75) 38.46,31.75 ; v1(37.59,31.75) 37.59,32.61 ; 97.43,15.62 v1(98.3,15.62) ; v1(98.3,15.62) 99.16,15.62 ; v1(98.3,15.62) 98.3,14.76 ; v1(98.3,15.62) 98.3,16.48 ; v1(116.2,48.51) 116.2,49.38 ; v1(116.2,48.51) 117.07,48.51 ; v1(116.2,48.51) 115.34,48.51 ; v1(116.2,48.51) 116.2,47.65 ; 137.54,19.84 v1(137.54,20.7) ; v1(137.54,20.7) 137.54,21.56 ; v1(137.54,20.7) 138.4,20.7 ; v1(137.54,20.7) 136.68,20.7 ; 35.1,115.9 v1(35.1,116.76) ; v1(35.1,116.76) 35.1,117.62 ; v1(35.1,116.76) 34.23,116.76 ; v1(35.1,116.76) 35.96,116.76 ; v1(37.47,27.3) 38.33,27.3 ; v1(37.47,27.3) 36.6,27.3 ; v1(37.47,27.3) 37.47,26.44 ; v1(37.47,27.3) 37.47,28.17 ; 124.08,52.98 v1(124.08,53.85) ; v1(124.08,53.85) 123.22,53.85 ; v1(124.08,53.85) 124.08,54.71 ; 149.99,59.46 v1(149.99,60.32) ; v1(149.99,60.32) 149.12,60.32 ; v1(149.99,60.32) 149.99,61.19 ; v1(135.31,77.8) 136.17,77.8 ; v1(135.31,77.8) 135.31,76.94 ; v1(135.31,77.8) 134.44,77.8 ; v1(135.31,77.8) 135.31,78.66 ; v1(144.27,61.72) 144.27,62.59 ; v1(144.27,61.72) 144.27,60.86 ; v1(144.27,61.72) 145.14,61.72 ; v1(144.27,61.72) 143.41,61.72 ; v1(108.2,76.71) 108.2,77.57 ; v1(108.2,76.71) 109.07,76.71 ; v1(108.2,76.71) 107.34,76.71 ; v1(108.2,76.71) 108.2,75.84 ; 68.55,84.96 v1(67.69,84.96) 67.69,85.83 ; 70.61,28.35 v1(70.61,29.21) ; v1(70.61,29.21) 70.61,30.07 ; v1(70.61,29.21) 69.75,29.21 ; v1(70.61,29.21) 71.48,29.21 ; v1(149.73,53.47) 149.73,54.33 ; v1(90.06,84.25) 90.92,84.25 ; v1(134.59,33.88) 134.59,34.75 ; v1(134.59,33.88) 134.59,33.02 ; v1(134.59,33.88) 135.46,33.88 ; v1(134.59,33.88) 133.73,33.88 ; 148.13,73.75 v1(148.13,74.61) ; v1(148.13,74.61) 147.27,74.61 ; v1(148.13,74.61) 148.13,75.48 ; v1(148.13,74.61) 149,74.61 ; 60.45,71.78 v1(60.45,72.64) 59.59,72.64 ; 127.63,26.16 v1(128.5,26.16) ; v1(128.5,26.16) 129.36,26.16 ; v1(128.5,26.16) 128.5,25.3 ; v1(128.5,26.16) 128.5,27.03 ; v1(101.78,40.72) 102.64,40.72 ; v1(101.78,40.72) 100.91,40.72 ; v1(101.78,40.72) 101.78,39.85 ; v1(101.78,40.72) 101.78,41.58 ; v1(37.97,74.68) 37.97,75.54 ; v1(37.97,74.68) 37.11,74.68 ; v1(37.97,74.68) 38.84,74.68 ; v1(54.5,87.13) 55.36,87.13 ; v1(54.5,87.13) 54.5,86.27 ; v1(54.5,87.13) 53.63,87.13 ; v1(54.5,87.13) 54.5,88 ; 118.92,97.66 v1(119.79,97.66) ; v1(119.79,97.66) 119.79,96.8 ; v1(119.79,97.66) 119.79,98.53 ; 62.59,73.79 v1(61.72,73.79) 61.72,74.65 ; 144.15,57.81 v1(144.15,58.67) ; v1(144.15,58.67) 145.01,58.67 ; v1(144.15,58.67) 144.15,59.54 ; v1(144.15,58.67) 143.28,58.67 ; v1(148.08,67.18) 148.08,68.05 ; v1(148.08,67.18) 147.22,67.18 ; 37.55,28.65 v1(37.55,29.51) ; v1(37.55,29.51) 38.41,29.51 ; v1(37.55,29.51) 36.68,29.51 ; v1(37.55,29.51) 37.55,30.37 ; v1(110.24,77.98) 111.1,77.98 ; v1(110.24,77.98) 109.37,77.98 ; v1(110.24,77.98) 110.24,77.11 ; v1(110.24,77.98) 110.24,78.84 ; v1(122.38,33.76) 122.38,34.62 ; v1(122.38,33.76) 122.38,32.89 ; v1(122.38,33.76) 123.24,33.76 ; v1(122.38,33.76) 121.51,33.76 ; 119.58,94.74 v1(119.58,95.61) ; v1(119.58,95.61) 119.58,96.47 ; v1(119.58,95.61) 118.72,95.61 ; v1(119.58,95.61) 120.45,95.61 ; 142.37,22.38 v1(142.37,23.24) ; v1(142.37,23.24) 142.37,24.1 ; v1(142.37,23.24) 143.23,23.24 ; v1(142.37,23.24) 141.5,23.24 ; 103.63,60.81 v1(103.63,59.94) 102.77,59.94 ; 37.34,115.85 v1(37.34,116.71) ; v1(37.34,116.71) 37.34,117.58 ; v1(37.34,116.71) 38.2,116.71 ; v1(37.34,116.71) 36.47,116.71 ; v1(32.89,116.84) 33.76,116.84 ; v1(32.89,116.84) 32.89,115.98 ; v1(32.89,116.84) 32.89,117.7 ; v1(146.35,58.59) 147.21,58.59 ; v1(146.35,58.59) 146.35,59.46 ; v1(146.35,58.59) 145.49,58.59 ; v1(146.35,58.59) 146.35,57.73 ; 102.64,41.15 v1(103.5,41.15) ; v1(103.5,41.15) 103.5,40.28 ; v1(103.5,41.15) 103.5,42.01 ; 90.14,113.42 DB15-2.9 ; 125.35,119.61 DB1.9 125.35,117.27 ; v1(97.6,55.05) 97.6,55.92 ; v1(97.6,55.05) 96.74,55.05 ; v1(97.6,55.05) 97.6,54.19 ; v1(35.81,73.03) 36.68,73.03 ; v1(35.81,73.03) 34.95,73.03 ; v1(35.81,73.03) 35.81,73.89 ; 140.42,24.96 v1(140.42,25.83) ; v1(140.42,25.83) 139.55,25.83 ; v1(140.42,25.83) 141.28,25.83 ; v1(140.42,25.83) 140.42,26.69 ; DB15-1.9 57.48,114.44 58.5,113.43 ; DB15-1.4 58.5,113.42 ; 59.59,73.79 v1(60.45,73.79) 60.45,74.65 ; 80.04,57.78 v1(80.9,57.78) ; v1(80.9,57.78) 80.9,58.65 ; v1(80.9,57.78) 81.76,57.78 ; v1(80.9,57.78) 80.9,56.92 ; v1(120.02,97.66) 120.88,97.66 ; v1(120.02,97.66) 120.02,96.8 ; v1(120.02,97.66) 120.02,98.53 ; 105,77.04 v1(105.87,77.04) ; v1(105.87,77.04) 106.73,77.04 ; v1(105.87,77.04) 105.87,77.9 ; 40.16,79.5 v1(41.02,79.5) ; 89.41,82.45 v1(89.41,83.31) 88.54,83.31 ; 147.92,40.92 v1(147.92,41.78) ; v1(147.92,41.78) 147.92,42.65 ; v1(147.92,41.78) 148.79,41.78 ; v1(147.92,41.78) 147.06,41.78 ; v1(119.25,110.62) 120.12,110.62 ; v1(119.25,110.62) 119.25,111.48 ; v1(119.25,110.62) 118.39,110.62 ; v1(119.25,110.62) 119.25,109.75 ; 110.24,67.28 v1(110.24,66.42) 109.37,66.42 ; H4.1 31.67,15.6 ; 61.85,71.91 v1(61.85,72.77) 62.71,72.77
  BOTTOM w0.381: DB1.10 132.49,118.44 DB1.9 ; H3.1 37.47,95.76 J21.1
  BOTTOM w0.508: v1(148.92,89.61) 149.02,89.61 v1(149.61,89.03)
  BOTTOM w2.032: U402.3 29.08,28.58 ; 29.08,28.58 25.65,25.15 ; 29.08,28.58 29.08,23.88 28.83,23.62 ; U403.5 7.49,88.01 2.29,93.22 ; U403.5 7.87,93.85 8.51,94.49 ; U403.5 8,88.01 14.35,94.36
  vias: v1(11.94,111.51) v1(11.94,107.06) v1(16.26,111.51) v1(16.38,106.93) v1(45.97,22.61) v1(45.97,20.57) v1(45.97,18.29) v1(46.1,41.02) v1(46.1,36.7) v1(48.06,20.49) v1(48.06,18.22) v1(48.19,38.91) v1(50.42,18.29) v1(50.55,36.7) v1(50.67,41.15) v1(132.97,106.43) v1(132.97,104.39) v1(132.97,102.11) v1(135.06,104.31) v1(137.41,102.11) v1(137.54,106.55) v1(141.48,108.33) v1(141.48,108.33) v1(142.22,110.13) v1(142.22,106.53) v1(144.02,110.87) v1(144.02,105.79) v1(145.81,110.13) v1(145.81,106.53) v1(146.56,108.33)
